# EAGLE board layer1 (EAGLE 9.6.2), part 1 of 2
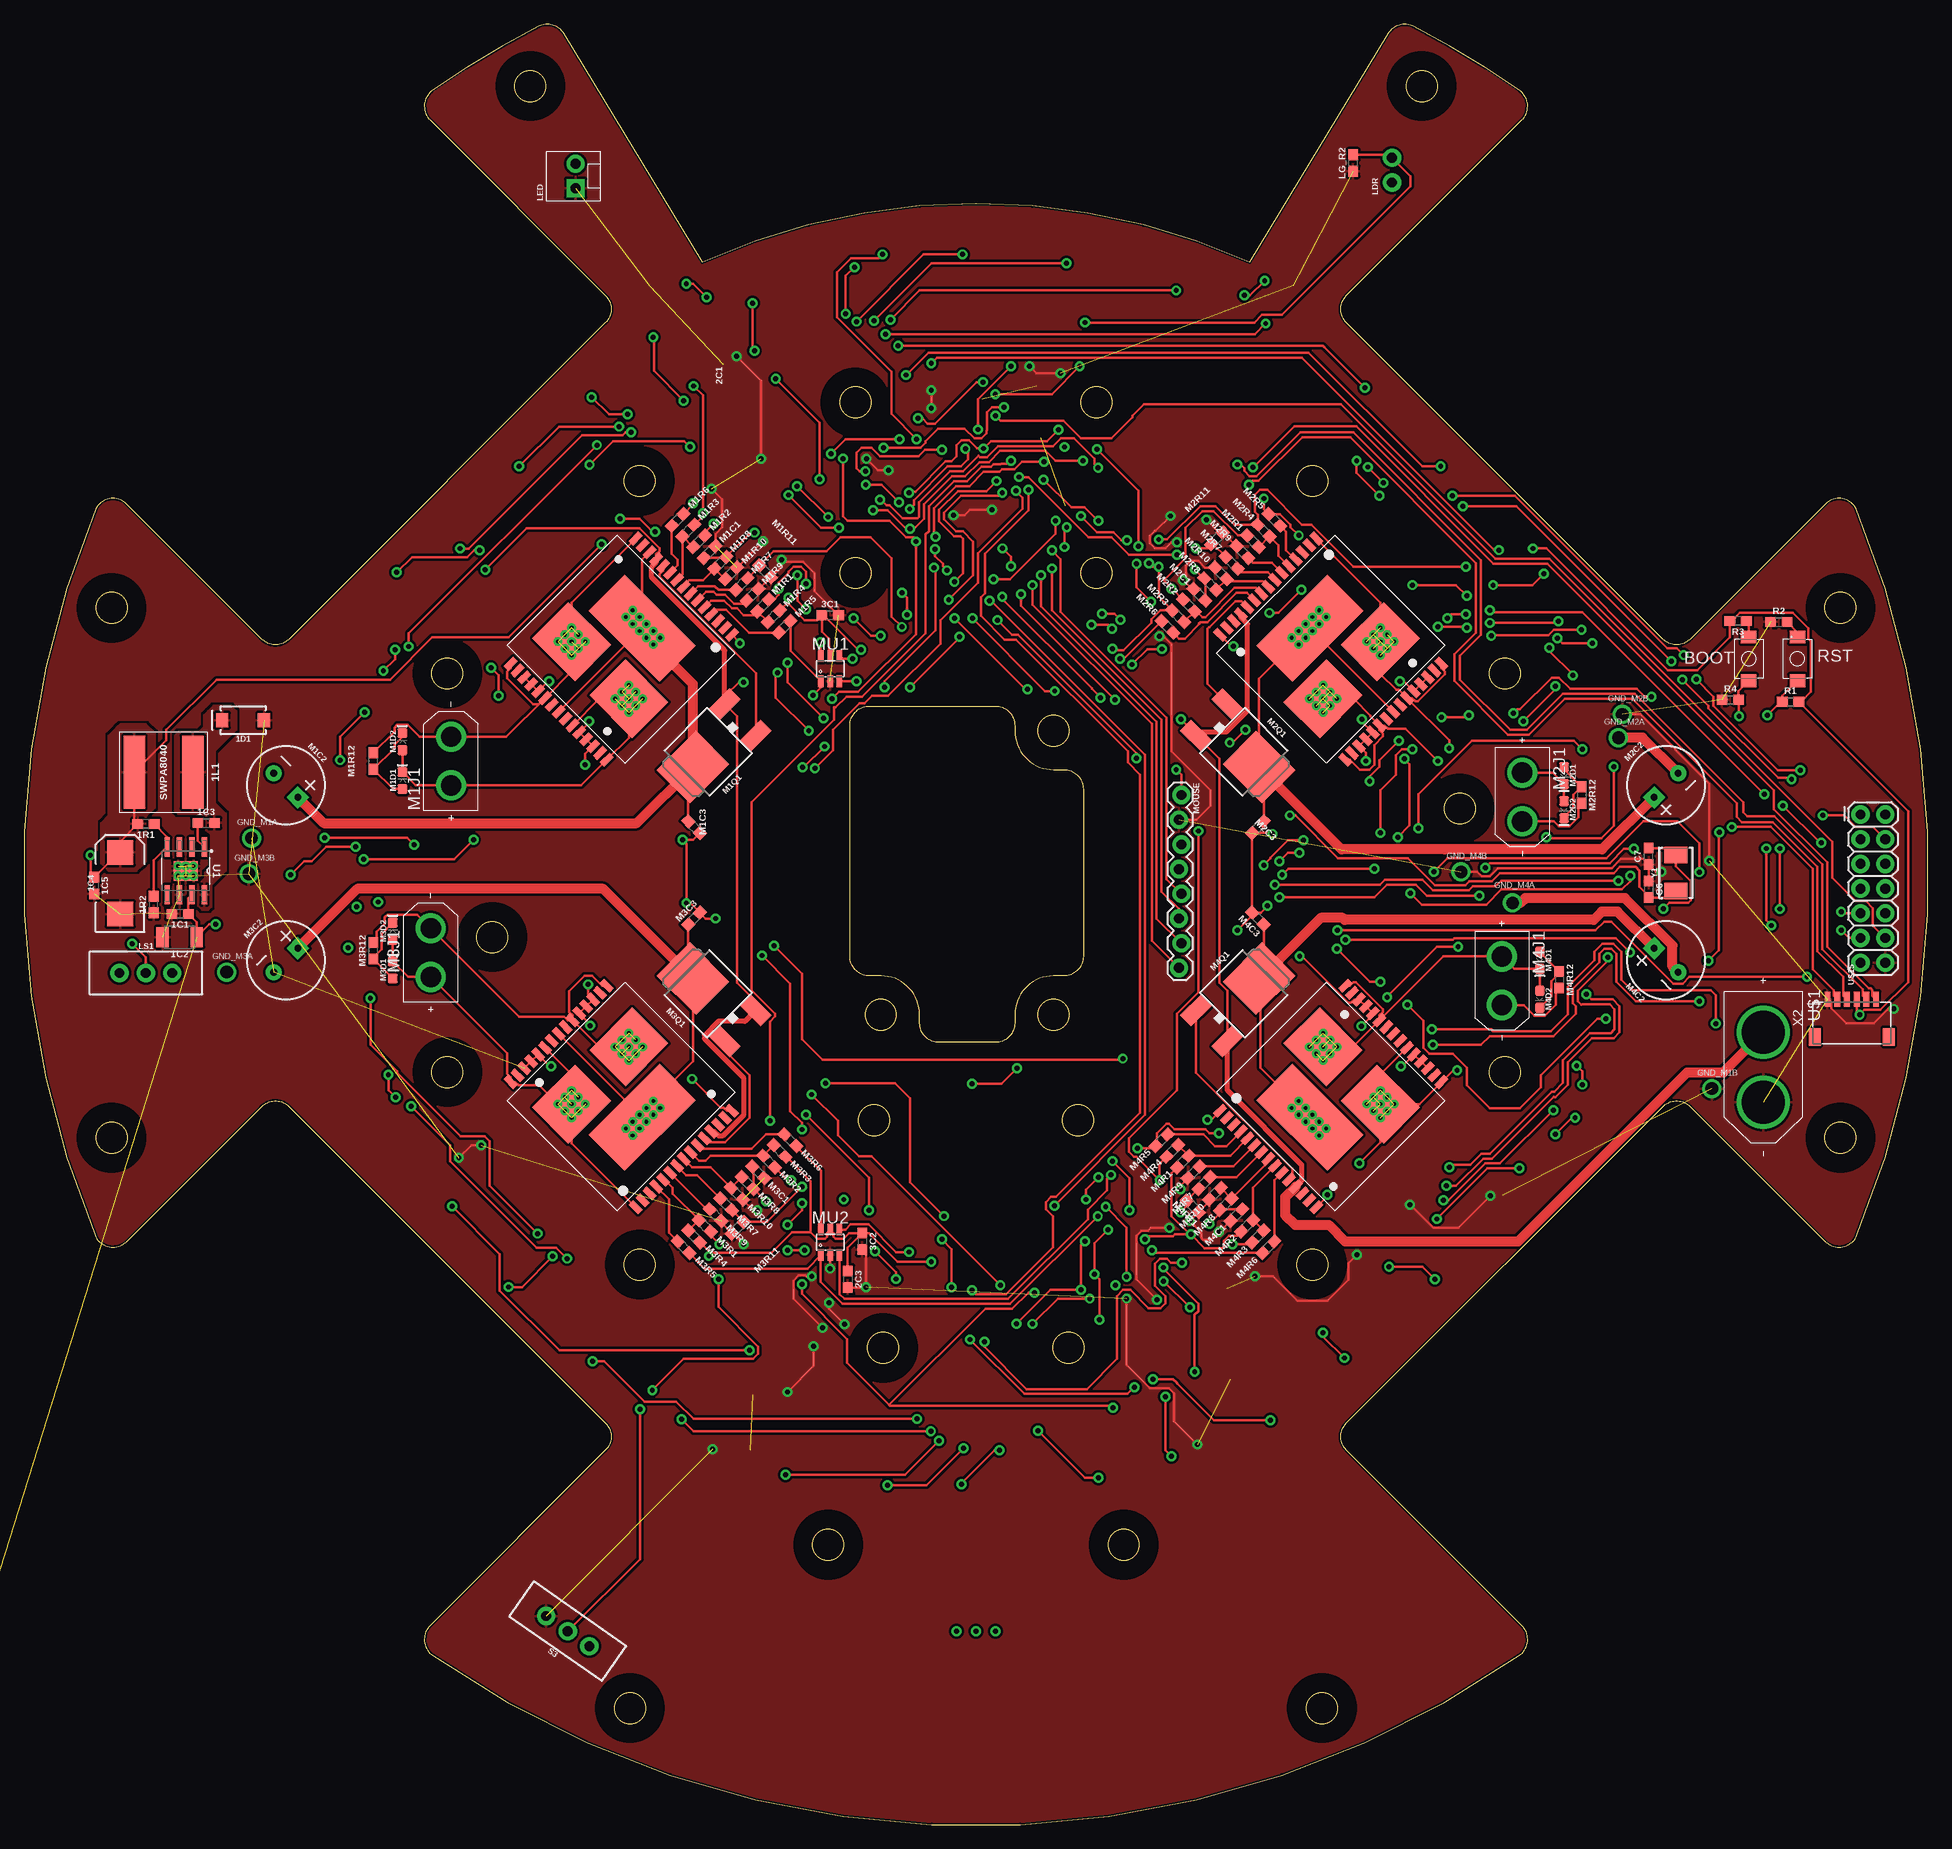
[diagram p0: board, top side]
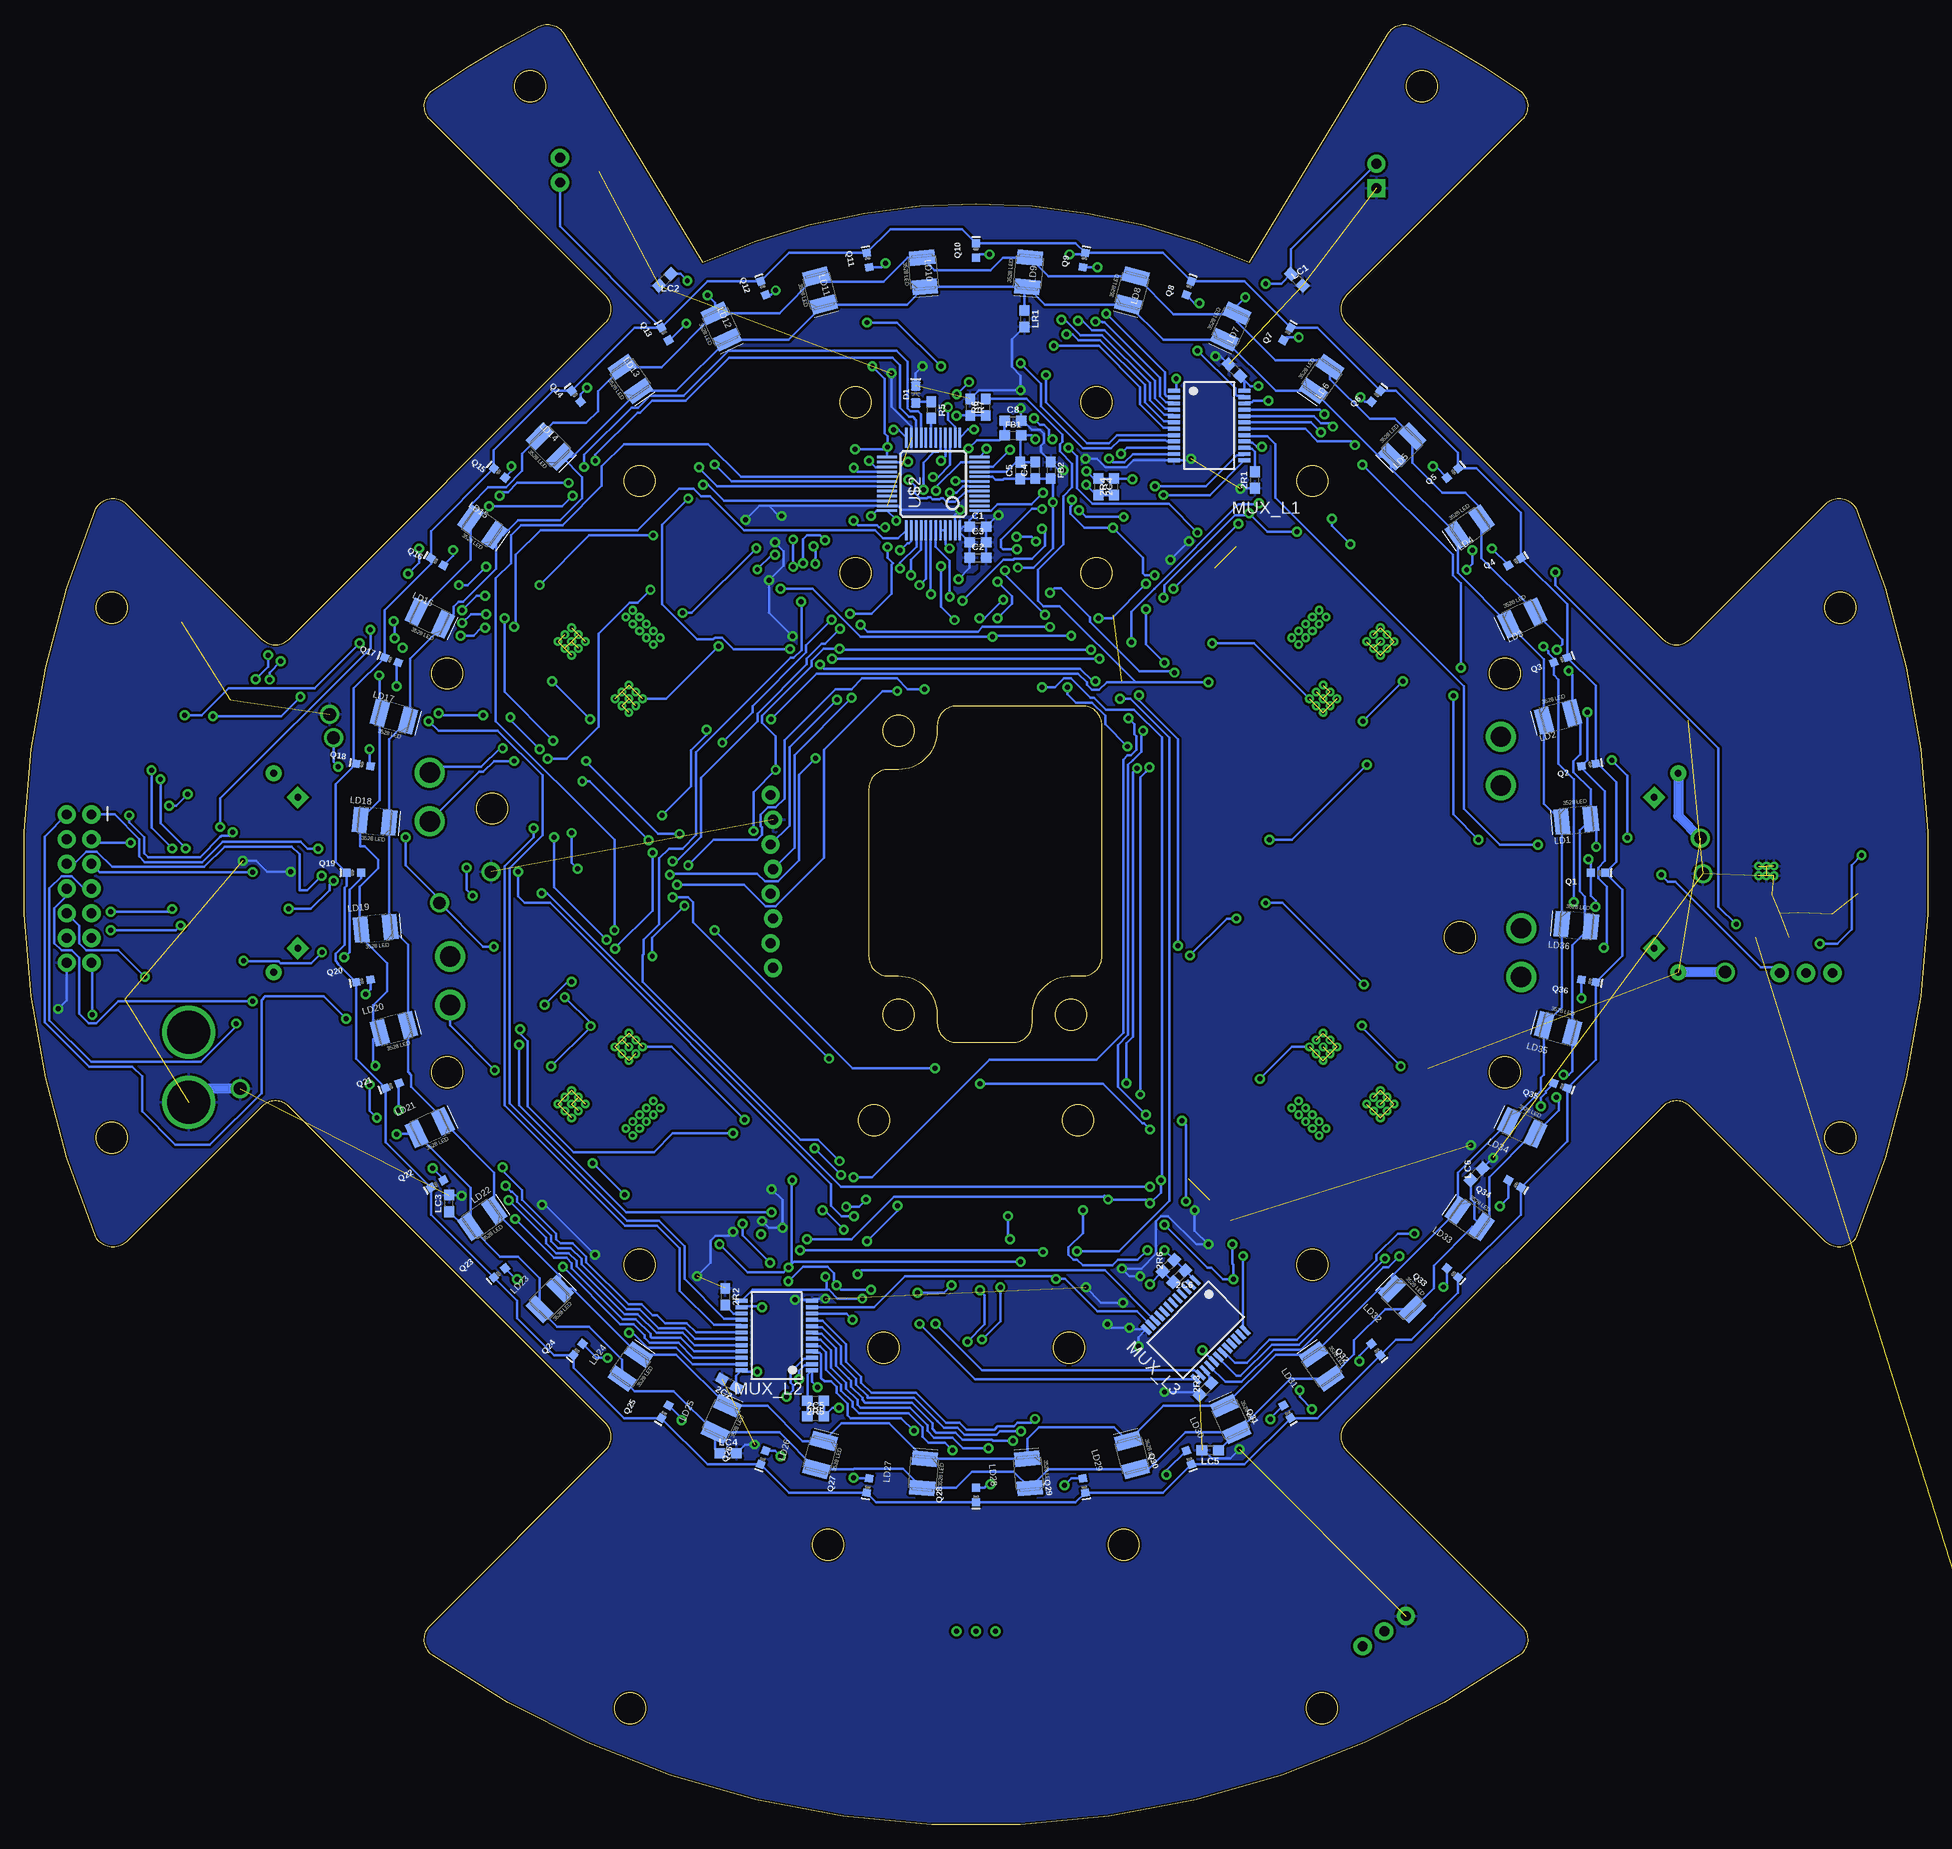
[diagram p1: board, bottom side, seen from below]

Size 195.82 x 185.17 mm. Coordinates in mm from the lower left corner, seen from the top.
Outline: 91 segments
Outline: circle at 186.83,70.65 radius 1.6
Outline: circle at 186.83,125.14 radius 1.6
Outline: circle at 105.9,112.51 radius 1.6
Outline: circle at 105.9,83.3 radius 1.6
Outline: circle at 88.12,83.3 radius 1.6
Outline: circle at 8.99,125.14 radius 1.6
Outline: circle at 8.99,70.65 radius 1.6
Outline: circle at 85.51,146.29 radius 1.6
Outline: circle at 110.31,146.29 radius 1.6
Outline: circle at 63.31,138.2 radius 1.6
Outline: circle at 132.5,138.2 radius 1.6
Outline: circle at 85.51,128.73 radius 1.6
Outline: circle at 110.31,128.73 radius 1.6
Outline: circle at 43.51,118.4 radius 1.6
Outline: circle at 105.9,112.51 radius 1.6
Outline: circle at 152.3,118.4 radius 1.6
Outline: circle at 152.3,77.39 radius 1.6
Outline: circle at 132.5,57.59 radius 1.6
Outline: circle at 87.41,72.45 radius 1.6
Outline: circle at 43.51,77.39 radius 1.6
Copper layers (1*16): Top 0.035mm / dielectric 1.5mm / Bottom 0.035mm
Design rules "SparkFun-2-layer-STANDARD": minimum track width 10mil, minimum drill 20mil, track to track 10mil, track to pad 8mil, pad to pad 8mil, via to via 10mil, smd to smd 8mil, copper to edge 8mil, drill to drill 8mil, minimum pad ring 10mil, minimum via ring 10mil, stop-mask expansion 4mil, vias tented up to drill 25mil, thermal gap 10mil
tRestrict: area 48.6,175.3 to 55.6,182.3; area 140.3,175.3 to 147.3,182.3; area 183.3,121.6 to 190.3,128.6; area 183.3,67.1 to 190.3,74.1; area 5.5,121.6 to 12.5,128.6; area 5.5,67.1 to 12.5,74.1; area 130,8.5 to 137,15.5; area 58.8,8.5 to 65.8,15.5; area 79.2,25.3 to 86.2,32.3; area 109.6,25.3 to 116.6,32.3; area 82,142.8 to 89,149.8; area 106.8,142.8 to 113.8,149.8; 19 more areas

## Footprints (pad centres in the part's own frame; a part is rotated, then mirrored left to right if it is on the bottom)
C0603 = smd 1.1 x 1: 1 -0.85,0; 2 0.85,0
C1210 = smd 1.27 x 2.06: 1 -1.755,0; 2 1.755,0
EIA7343 = smd 2.55 x 2.7: A 3.17,0; C -3.17,0
SMA-DIODE = smd 1.27 x 1.47: A -2.15,0; C 2.15,0
SWPA8040 = smd 2.2 x 7.5: P1 -3,0; P2 3,0
R0603 = smd 1.1 x 1: 1 -0.85,0; 2 0.85,0
MOMENTARY_SWITCH_4X3 = smd 1.3 x 1.6: P$1 -2.25,0; P$2 2.25,0
LED-0603 = smd 1 x 1: A -0.877,0; C 0.877,0
0603 = smd 1.1 x 1: 1 -0.85,0; 2 0.85,0
18AWG = drill 1.3: P$1 0,0
3528 = smd 1.5 x 2.6: A -1.5,0; C 1.5,0
1X02_NO_SILK = drill 1.016 pad 1.88: 1 0,0; 2 2.54,0
MOLEX-1X2 = drill 1.016 pad 1.88 square: 1 0,0 | drill 1.016 pad 1.88: 2 2.54,0
SWITCH_SPDT_PTH_11.6X4.0MM_LOCK = drill 1.016 pad 1.88: 1 0,2.718; 2 0,0; 3 0,-2.718
3.5MM_CAP = drill 0.7 pad 1.651 square: 1 1.75,0 | drill 0.7 pad 1.651: 2 -1.75,0
XT30PB-F = drill 2.1: + -2.5,0; - 2.5,0
DPAK = smd 1.6 x 3: 1 -2.28,-5.31; 3 2.28,-5.31 | smd 4.826 x 5.715: 4 0,1.588
POWERSO-30 = smd 0.65 x 1.4: P1 -7,-9.1; P2 -6,-9.1; P3 -5,-9.1; P4 -4,-9.1; P5 -3,-9.1; P6 -2,-9.1; P7 -1,-9.1; P8 0,-9.1; P9 1,-9.1; P10 2,-9.1; P11 3,-9.1; P12 4,-9.1; P13 5,-9.1; P14 6,-9.1; P15 7,-9.1; P16 7,9.1; P17 6,9.1; P18 5,9.1; P19 4,9.1; P20 3,9.1; P21 2,9.1; P22 1,9.1; P23 0,9.1; P24 -1,9.1; P25 -2,9.1; P26 -3,9.1; P27 -4,9.1; P28 -5,9.1; P29 -6,9.1; P30 -7,9.1 | drill 0.381: P$1 -4.165,3.05; P$2 -3.165,3.05; P$3 -5.165,3.05; P$4 -5.165,2.05; P$5 -4.165,2.05; P$6 -3.165,2.05; P$7 -5.165,4.05; P$8 -4.165,4.05; P$9 -3.165,4.05; P$10 4.165,3.05; P$11 5.165,3.05; P$12 3.165,3.05; P$13 3.165,2.05; P$14 4.165,2.05; P$15 5.165,2.05; P$16 3.165,4.05; P$17 4.165,4.05; P$18 5.165,4.05; P$19 0,-2.669; P$20 -1,-2.669; P$21 1,-2.669; P$22 -2,-2.669; P$23 2,-2.669; P$24 0,-3.669; P$25 1,-3.669; P$26 2,-3.669; P$27 -1,-3.669; P$28 -2,-3.669 | smd 10.3 x 5.25: SLUG1 0,-3.05 | smd 6.23 x 5.25: SLUG2 -4.165,3.05; SLUG3 4.165,3.05
1X08_LOCK = drill 1.016 pad 1.88: 1 0,0.127; 2 2.54,-0.127; 3 5.08,0.127; 4 7.62,-0.127; 5 10.16,0.127; 6 12.7,-0.127; 7 15.24,0.127; 8 17.78,-0.127
SOT23-6 = smd 0.55 x 1.2: 1 -0.95,-1.3; 2 0,-1.3; 3 0.95,-1.3; 4 0.95,1.3; 5 0,1.3; 6 -0.95,1.3
SSOP24 = smd 0.4 x 1.25: 1 -3.575,-3.625; 2 -2.925,-3.625; 3 -2.275,-3.625; 4 -1.625,-3.625; 5 -0.975,-3.625; 6 -0.325,-3.625; 7 0.325,-3.625; 8 0.975,-3.625; 9 1.625,-3.625; 10 2.275,-3.625; 11 2.925,-3.625; 12 3.575,-3.625; 13 3.575,3.625; 14 2.925,3.625; 15 2.275,3.625; 16 1.625,3.625; 17 0.975,3.625; 18 0.325,3.625; 19 -0.325,3.625; 20 -0.975,3.625; 21 -1.625,3.625; 22 -2.275,3.625; 23 -2.925,3.625; 24 -3.575,3.625
ALS-PT19 = smd 0.8 x 0.8: C -0.75,0; E 0.75,0
POWERPAD-SOIC-8 = smd 1.981 x 0.559: 1 -2.464,1.905; 2 -2.464,0.635; 3 -2.464,-0.635; 4 -2.464,-1.905; 5 2.464,-1.905; 6 2.464,-0.635; 7 2.464,0.635; 8 2.464,1.905 | smd 2.007 x 2.489: 9 0,0 | drill 0.381: P$1 -0.5,0.8; P$2 0.5,0.8; P$3 -0.5,0; P$4 0.5,0; P$5 -0.5,-0.8; P$6 0.5,-0.8
XT60PB-M = drill 4.4: + -3.6,0; - 3.6,0
LQFP48 = smd 0.254 x 2.032: 1 -2.75,-4.758; 2 -2.25,-4.758; 3 -1.75,-4.758; 4 -1.25,-4.758; 5 -0.75,-4.758; 6 -0.25,-4.758; 7 0.25,-4.758; 8 0.75,-4.758; 9 1.25,-4.758; 10 1.75,-4.758; 11 2.25,-4.758; 12 2.75,-4.758; 25 2.75,4.758; 26 2.25,4.758; 27 1.75,4.758; 28 1.25,4.758; 29 0.75,4.758; 30 0.25,4.758; 31 -0.25,4.758; 32 -0.75,4.758; 33 -1.25,4.758; 34 -1.75,4.758; 35 -2.25,4.758; 36 -2.75,4.758 | smd 2.032 x 0.254: 13 4.758,-2.75; 14 4.758,-2.25; 15 4.758,-1.75; 16 4.758,-1.25; 17 4.758,-0.75; 18 4.758,-0.25; 19 4.758,0.25; 20 4.758,0.75; 21 4.758,1.25; 22 4.758,1.75; 23 4.758,2.25; 24 4.758,2.75; 37 -4.758,2.75; 38 -4.758,2.25; 39 -4.758,1.75; 40 -4.758,1.25; 41 -4.758,0.75; 42 -4.758,0.25; 43 -4.758,-0.25; 44 -4.758,-0.75; 45 -4.758,-1.25; 46 -4.758,-1.75; 47 -4.758,-2.25; 48 -4.758,-2.75
2X7 = drill 1.016 pad 1.88: 1 0,0; 2 0,2.54; 3 2.54,0; 4 2.54,2.54; 5 5.08,0; 6 5.08,2.54; 7 7.62,0; 8 7.62,2.54; 9 10.16,0; 10 10.16,2.54; 11 12.7,0; 12 12.7,2.54; 13 15.24,0; 14 15.24,2.54
SM06B-SRSS-TB = smd 0.6 x 1.55: 1 2.5,0; 2 1.5,0; 3 0.5,0; 4 -0.5,0; 5 -1.5,0; 6 -2.5,0 | smd 1.2 x 1.8: M1 3.8,3.875; M2 -3.8,3.875
CRYSTAL-SMD-5X3.2-2PAD = smd 1.7 x 2.4: P$1 1.85,0; P$2 -1.85,0

## Placement (x,y rotation side)
1C1  4.7uF  [C0603]  16.03,93.67 180 top
1C2  22uF  [C1210]  15.98,91.28 180 top
1C3  10nF  [C0603]  18.71,103.03 0 top
1C4  220uF  [EIA7343]  9.86,96.82 90 top
1C5  0.1uF  [C0603]  7.18,96.58 270 top
1D1  SS54  [SMA-DIODE]  22.51,113.59 180 top
1L1  10uH  [SWPA8040]  14.33,108.24 180 top
1R1  10k  [R0603]  12.51,102.92 180 top
1R2  5.9k  [R0603]  13.32,94.64 90 top
2C1  0.1uF  [C0603]  71.31,149.59 135 bottom
2C2  0.1uF  [C0603]  123.31,45.39 150 bottom
2C3  0.1uF  [C0603]  84.71,56.09 270 top
2C4  1uF  [C0603]  85.31,137.59 270 bottom
2C5  1uF  [C0603]  114.41,41.99 0 bottom
2C6  1uF  [C0603]  77.01,56.39 225 bottom
2R1  1k  [R0603]  69.21,138.29 90 bottom
2R2  1k  [R0603]  123.71,54.29 270 bottom
2R3  1k  [R0603]  74.31,44.79 45 bottom
2R4  3k  [R0603]  83.71,137.59 90 bottom
2R5  3k  [R0603]  114.41,43.59 180 bottom
2R6  3k  [R0603]  78.11,57.49 45 bottom
3C1  0.1uF  [C0603]  82.91,124.39 0 top
3C2  0.1uF  [C0603]  86.21,59.99 270 top
BOOT  MOMENTARY_SWITCH_4X3  [MOMENTARY_SWITCH_4X3]  177.41,119.89 270 top
C1  1uF  [C0603]  97.71,133.49 0 bottom
C2  1uF  [C0603]  97.71,130.29 0 bottom
C3  1uF  [C0603]  97.71,131.89 0 bottom
C4  10nF  [C0603]  91.81,139.29 90 bottom
C5  1uF  [C0603]  93.35,139.27 90 bottom
C6  22pF  [C0603]  167.11,96.19 270 top
C7  22pF  [C0603]  167.11,99.59 90 top
C8  1uF  [C0603]  94.11,144.39 0 bottom
D1  BLUE  [LED-0603]  104.11,147.09 90 bottom
FB1  30Ω/1.8A  [0603]  94.11,142.89 0 bottom
FB2  30Ω/1.8A  [0603]  90.21,139.29 270 bottom
GND_M1A  18AWG  [18AWG]  23.38,101.46 0 top
GND_M1B  18AWG  [18AWG]  173.61,75.69 0 top
GND_M2A  18AWG  [18AWG]  164.01,111.79 0 top
GND_M2B  18AWG  [18AWG]  164.41,114.19 0 top
GND_M3A  18AWG  [18AWG]  20.83,87.68 0 top
GND_M3B  18AWG  [18AWG]  23.11,97.79 0 top
GND_M4A  18AWG  [18AWG]  153.11,94.79 0 top
GND_M4B  18AWG  [18AWG]  147.81,97.99 0 top
LC1  1uF  [C0603]  64.91,158.89 315 bottom
LC2  1uF  [C0603]  129.91,158.89 225 bottom
LC3  1uF  [C0603]  152.11,63.89 90 bottom
LC4  1uF  [C0603]  123.41,38.19 0 bottom
LC5  1uF  [C0603]  73.81,38.49 180 bottom
LC6  1uF  [C0603]  46.41,66.89 45 bottom
LD1  3528LED  [3528]  36.14,103.3 185 bottom
LD2  3528LED  [3528]  38.02,113.94 195 bottom
LD3  3528LED  [3528]  41.72,124.1 205 bottom
LD4  3528LED  [3528]  47.12,133.46 215 bottom
LD5  3528LED  [3528]  54.07,141.73 225 bottom
LD6  3528LED  [3528]  62.35,148.68 235 bottom
LD7  3528LED  [3528]  71.71,154.09 245 bottom
LD8  3528LED  [3528]  81.86,157.78 255 bottom
LD9  3528LED  [3528]  92.5,159.66 265 bottom
LD10  3528LED  [3528]  103.31,159.66 275 bottom
LD11  3528LED  [3528]  113.96,157.78 285 bottom
LD12  3528LED  [3528]  124.11,154.09 295 bottom
LD13  3528LED  [3528]  133.47,148.68 305 bottom
LD14  3528LED  [3528]  141.75,141.73 315 bottom
LD15  3528LED  [3528]  148.7,133.46 325 bottom
LD16  3528LED  [3528]  154.1,124.1 335 bottom
LD17  3528LED  [3528]  157.8,113.94 345 bottom
LD18  3528LED  [3528]  159.77,103.2 355 bottom
LD19  3528LED  [3528]  159.67,92.19 5 bottom
LD20  3528LED  [3528]  157.8,81.85 15 bottom
LD21  3528LED  [3528]  154.1,71.69 25 bottom
LD22  3528LED  [3528]  148.7,62.33 35 bottom
LD23  3528LED  [3528]  141.75,54.05 45 bottom
LD24  3528LED  [3528]  133.47,47.11 55 bottom
LD25  3528LED  [3528]  124.11,41.7 65 bottom
LD26  3528LED  [3528]  113.96,38.01 75 bottom
LD27  3528LED  [3528]  103.31,36.13 85 bottom
LD28  3528LED  [3528]  92.5,36.13 95 bottom
LD29  3528LED  [3528]  81.86,38.01 105 bottom
LD30  3528LED  [3528]  71.71,41.7 115 bottom
LD31  3528LED  [3528]  62.35,47.11 125 bottom
LD32  3528LED  [3528]  54.07,54.05 135 bottom
LD33  3528LED  [3528]  47.12,62.33 145 bottom
LD34  3528LED  [3528]  41.72,71.69 155 bottom
LD35  3528LED  [3528]  38.02,81.85 165 bottom
LD36  3528LED  [3528]  36.14,92.49 175 bottom
LDR  [1X02_NO_SILK]  140.71,168.89 90 top
LED  [MOLEX-1X2]  56.71,168.29 90 top
LG_R2  2k  [R0603]  136.71,170.89 90 top
LR1  47  [R0603]  92.91,154.89 270 bottom
LS1  [SWITCH_SPDT_PTH_11.6X4.0MM_LOCK]  12.51,87.59 270 top
M1C1  33nF  [C0603]  70.51,130.89 45 top
M1C2  680uF  [3.5MM_CAP]  26.91,106.89 315 top
M1C3  1.0uF  [C0603]  68.91,102.59 315 top
M1D1  RED  [LED-0603]  38.91,107.39 90 top
M1D2  BLUE  [LED-0603]  38.91,111.39 90 top
M1J1  XT30PB-F  [XT30PB-F]  43.91,109.39 90 top
M1Q1  AOD482  [DPAK]  69.91,109.89 135 top
M1R1  1k  [R0603]  76.01,125.39 225 top
M1R2  1k  [R0603]  69.41,131.99 225 top
M1R3  3.3k  [R0603]  68.31,133.09 45 top
M1R4  3.3k  [R0603]  77.11,124.29 45 top
M1R5  1k  [R0603]  78.21,123.19 225 top
M1R6  1k  [R0603]  67.21,134.19 225 top
M1R7  1k  [R0603]  73.81,127.59 225 top
M1R8  10k  [R0603]  71.61,129.79 225 top
M1R9  10k  [R0603]  74.91,126.49 225 top
M1R10  1k  [R0603]  72.71,128.69 225 top
M1R11  10k  [R0603]  76.21,128.89 135 top
M1R12  4.7k  [R0603]  35.91,109.39 90 top
M2C1  33nF  [C0603]  120.91,126.49 135 top
M2C2  680uF  [3.5MM_CAP]  168.91,106.89 225 top
M2C3  1.0uF  [C0603]  126.91,102.59 225 top
M2D1  RED  [LED-0603]  158.41,107.89 270 top
M2D2  BLUE  [LED-0603]  158.41,104.39 270 top
M2J1  XT30PB-F  [XT30PB-F]  154.11,105.69 270 top
M2Q1  AOD482  [DPAK]  125.91,109.89 225 top
M2R1  1k  [R0603]  126.41,131.99 315 top
M2R2  1k  [R0603]  119.81,125.39 315 top
M2R3  3.3k  [R0603]  118.71,124.29 135 top
M2R4  3.3k  [R0603]  127.51,133.09 135 top
M2R5  1k  [R0603]  128.61,134.19 315 top
M2R6  1k  [R0603]  117.61,123.19 315 top
M2R7  1k  [R0603]  124.21,129.79 315 top
M2R8  10k  [R0603]  122.01,127.59 315 top
M2R9  10k  [R0603]  125.31,130.89 315 top
M2R10  1k  [R0603]  123.11,128.69 315 top
M2R11  10k  [R0603]  122.71,132.29 225 top
M2R12  4.7k  [R0603]  160.21,105.89 270 top
M3C1  33nF  [C0603]  75.51,67.09 315 top
M3C2  680uF  [3.5MM_CAP]  26.91,88.89 45 top
M3C3  1.0uF  [C0603]  68.91,93.19 45 top
M3D1  RED  [LED-0603]  37.91,87.89 90 top
M3D2  BLUE  [LED-0603]  37.91,91.89 90 top
M3J1  XT30PB-F  [XT30PB-F]  41.81,89.69 90 top
M3Q1  AOD482  [DPAK]  69.91,85.89 45 top
M3R1  1k  [R0603]  70.01,61.59 135 top
M3R2  1k  [R0603]  76.61,68.19 135 top
M3R3  3.3k  [R0603]  77.71,69.29 315 top
M3R4  3.3k  [R0603]  68.91,60.49 315 top
M3R5  1k  [R0603]  67.81,59.39 135 top
M3R6  1k  [R0603]  78.81,70.39 135 top
M3R7  1k  [R0603]  72.21,63.79 135 top
M3R8  10k  [R0603]  74.41,65.99 135 top
M3R9  10k  [R0603]  71.11,62.69 135 top
M3R10  1k  [R0603]  73.31,64.89 135 top
M3R11  10k  [R0603]  73.41,61.39 45 top
M3R12  4.7k  [R0603]  35.91,89.89 90 top
M4C1  33nF  [C0603]  124.71,62.69 225 top
M4C2  680uF  [3.5MM_CAP]  168.91,88.89 135 top
M4C3  1.0uF  [C0603]  126.91,93.19 135 top
M4D1  RED  [LED-0603]  155.91,88.89 270 top
M4D2  BLUE  [LED-0603]  155.91,84.89 270 top
M4J1  XT30PB-F  [XT30PB-F]  152.01,86.79 270 top
M4Q1  AOD482  [DPAK]  125.91,85.89 315 top
M4R1  1k  [R0603]  119.21,68.19 45 top
M4R2  1k  [R0603]  125.81,61.59 45 top
M4R3  3.3k  [R0603]  126.91,60.49 225 top
M4R4  3.3k  [R0603]  118.11,69.29 225 top
M4R5  1k  [R0603]  117.01,70.39 45 top
M4R6  1k  [R0603]  128.01,59.39 45 top
M4R7  1k  [R0603]  121.41,65.99 45 top
M4R8  10k  [R0603]  123.61,63.79 45 top
M4R9  10k  [R0603]  120.31,67.09 45 top
M4R10  1k  [R0603]  122.51,64.89 45 top
M4R11  10k  [R0603]  120.21,63.59 135 top
M4R12  4.7k  [R0603]  157.91,86.89 270 top
M_BL  VNH5019  [POWERSO-30]  61.41,74.89 45 top
M_BR  VNH5019  [POWERSO-30]  134.41,74.89 315 top
M_FL  VNH5019  [POWERSO-30]  61.41,120.89 135 top
M_FR  VNH5019  [POWERSO-30]  134.41,120.89 225 top
MOUSE  [1X08_LOCK]  118.91,105.89 270 top
MU1  [SOT23-6]  82.91,118.89 0 top
MU2  [SOT23-6]  82.91,59.89 0 top
MUX_L1  [SSOP24]  73.91,143.89 270 bottom
MUX_L2  [SSOP24]  118.41,50.29 90 bottom
MUX_L3  [SSOP24]  75.31,50.89 225 bottom
Q1  [ALS-PT19]  33.91,97.89 180 bottom
Q2  [ALS-PT19]  34.88,109.01 190 bottom
Q3  [ALS-PT19]  37.77,119.78 200 bottom
Q4  [ALS-PT19]  42.48,129.89 210 bottom
Q5  [ALS-PT19]  48.88,139.03 220 bottom
Q6  [ALS-PT19]  56.77,146.92 230 bottom
Q7  [ALS-PT19]  65.91,153.32 240 bottom
Q8  [ALS-PT19]  76.02,158.03 250 bottom
Q9  [ALS-PT19]  86.79,160.92 260 bottom
Q10  [ALS-PT19]  97.91,161.89 270 bottom
Q11  [ALS-PT19]  109.02,160.92 280 bottom
Q12  [ALS-PT19]  119.8,158.03 290 bottom
Q13  [ALS-PT19]  129.91,153.32 300 bottom
Q14  [ALS-PT19]  139.05,146.92 310 bottom
Q15  [ALS-PT19]  146.94,139.03 320 bottom
Q16  [ALS-PT19]  153.33,129.89 330 bottom
Q17  [ALS-PT19]  158.05,119.78 340 bottom
Q18  [ALS-PT19]  160.94,109.01 350 bottom
Q19  [ALS-PT19]  161.91,97.89 0 bottom
Q20  [ALS-PT19]  160.94,86.78 10 bottom
Q21  [ALS-PT19]  157.95,76 20 bottom
Q22  [ALS-PT19]  153.33,65.89 30 bottom
Q23  [ALS-PT19]  146.94,56.76 40 bottom
Q24  [ALS-PT19]  138.85,48.87 50 bottom
Q25  [ALS-PT19]  129.91,42.47 60 bottom
Q26  [ALS-PT19]  119.8,37.75 70 bottom
Q27  [ALS-PT19]  109.02,34.87 80 bottom
Q28  [ALS-PT19]  97.91,33.89 90 bottom
Q29  [ALS-PT19]  86.79,34.87 100 bottom
Q30  [ALS-PT19]  76.02,37.75 110 bottom
Q31  [ALS-PT19]  65.91,42.47 120 bottom
Q32  [ALS-PT19]  56.77,48.87 130 bottom
Q33  [ALS-PT19]  48.88,56.76 140 bottom
Q34  [ALS-PT19]  42.48,65.89 150 bottom
Q35  [ALS-PT19]  37.77,76 160 bottom
Q36  [ALS-PT19]  34.88,86.78 170 bottom
R1  10k  [R0603]  181.71,115.49 0 top
R2  1k  [R0603]  180.51,123.69 0 top
R3  1k  [R0603]  176.31,123.79 180 top
R4  10k  [R0603]  175.51,115.69 0 top
R5  470  [R0603]  102.51,145.49 270 bottom
R6  2M  [R0603]  96.91,145.79 90 bottom
R7  500k  [R0603]  98.51,145.79 270 bottom
RST  MOMENTARY_SWITCH_4X3  [MOMENTARY_SWITCH_4X3]  182.41,119.89 270 top
S3  [SWITCH_SPDT_PTH_11.6X4.0MM_LOCK]  55.91,19.89 55 top
U1  [POWERPAD-SOIC-8]  16.61,98.09 270 top
U$1  XT60XT60PB-M  [XT60PB-M]  178.91,77.89 270 top
U$2  STM32F103CBT6  [LQFP48]  102.31,137.89 90 bottom
U$15  CONN_07X2  [2X7]  188.91,103.89 270 top
V_BATT_M1  18AWG  [18AWG]  -15.29,-14.61 0 top  (outside the outline)
V_BATT_M2  18AWG  [18AWG]  -15.29,-17.91 0 top  (outside the outline)
V_BATT_M3  18AWG  [18AWG]  -15.29,-21.21 0 top  (outside the outline)
V_BATT_M4  18AWG  [18AWG]  -15.29,-24.51 0 top  (outside the outline)
X2  SM06B-SRSS-TB  [SM06B-SRSS-TB]  188.01,84.89 180 top
Y1  8MHz  [CRYSTAL-SMD-5X3.2-2PAD]  169.91,97.89 90 top

## Library data of the parts
1C1-1C3 1C5 1D1 1L1 1R1 1R2 2C1-2C6 2R1-2R6 3C1 3C2 C1-C8 GND_M1A GND_M1B GND_M2A GND_M2B GND_M3A GND_M3B GND_M4A GND_M4B LC1-LC6 LD1-LD36 LG_R2 LR1 M1C1 M1C3 M1J1 M1R1-M1R12 M2C1 M2C3 M2J1 M2R1-M2R12 M3C1 M3C3 M3J1 M3R1-M3R12 M4C1 M4C3 M4J1 M4R1-M4R12 M_BL M_BR M_FL M_FR MUX_L1-MUX_L3 R1-R7 U1 U$1 U$2 V_BATT_M1-V_BATT_M4 = JH
1C4 = SparkFun-Capacitors; PROD_ID: CAP-07890
BOOT M1C2 M2C2 M3C2 M4C2 MU1 MU2 RST U$15 = MY-LIBRARY
D1 = SparkFun-LED
FB1 FB2 = SparkFun-Coils; PROD_ID: NDUC-13805
LDR MOUSE = SparkFun-Connectors
LED = SparkFun-Connectors; SF_ID: PRT-09918
LS1 S3 = SparkFun-Switches; PROD_ID: SWCH-08261; SF_SKU: COM-00102
M1D1 M2D1 M3D1 M4D1 = SparkFun-LED; PROD_ID: DIO-00819
M1D2 M2D2 M3D2 M4D2 = SparkFun-LED; PROD_ID: DIO-08575
M1Q1 M2Q1 M3Q1 M4Q1 = SparkFun-DiscreteSemi; PROD_ID: TRANS-09984
Q1-Q36 = SparkFun-Sensors; PROD_ID: IC-11836; SF_ID: SEN-12566
X2 = con-JST SH
Y1 = SparkFun-Clocks

## Nets
3.3V: 1C4.A 1C5.1 1L1.P2 1R1.2 2C1.1 2C2.1 2C3.1 3C1.1 3C2.1 C1.1 C2.1 C3.1 C8.1 FB1.1 LS1.2 M1R3.2 M1R4.2 M2R3.2 M2R4.2 M3R3.2 M3R4.2 M4R3.2 M4R4.2 MOUSE.1 MU1.5 MU2.5 MUX_L1.24 MUX_L2.24 MUX_L3.24 R1.2 R3.2 U$2.1 U$2.24 U$2.36 U$2.48 U$15.13 X2.4
AGND: 2C4.2 2C5.2 2C6.2 2R4.1 2R5.1 2R6.1 C4.1 C5.1 FB2.2 U$2.8
BATT_LVL: R6.1 R7.2 U$15.12
BL_CS: M3C1.1 M3R8.1 U$2.16
BL_DIR: M3R5.1 MU2.1 U$15.5
BL_OUTA: M3D1.C M3D2.A M3J1.+ M_BL.P1 M_BL.P25 M_BL.P30 M_BL.P$1 M_BL.P$2 M_BL.P$3 M_BL.P$4 M_BL.P$5 M_BL.P$6 M_BL.P$7 M_BL.P$8 M_BL.P$9 M_BL.SLUG2
BL_OUTB: M3J1.- M3R12.2 M_BL.P15 M_BL.P16 M_BL.P21 M_BL.P$10 M_BL.P$11 M_BL.P$12 M_BL.P$13 M_BL.P$14 M_BL.P$15 M_BL.P$16 M_BL.P$17 M_BL.P$18 M_BL.SLUG3
BL_PWM: M3R7.1 M3R11.2 U$15.6
BOOT0: BOOT.P$2 R4.2 U$2.44 U$2.45
BR_CS: M4C1.1 M4R8.1 U$2.17
BR_DIR: M4R5.1 MU2.3 U$15.7
BR_OUTA: M4D1.C M4D2.A M4J1.+ M_BR.P1 M_BR.P25 M_BR.P30 M_BR.P$1 M_BR.P$2 M_BR.P$3 M_BR.P$4 M_BR.P$5 M_BR.P$6 M_BR.P$7 M_BR.P$8 M_BR.P$9 M_BR.SLUG2
BR_OUTB: M4J1.- M4R12.2 M_BR.P15 M_BR.P16 M_BR.P21 M_BR.P$10 M_BR.P$11 M_BR.P$12 M_BR.P$13 M_BR.P$14 M_BR.P$15 M_BR.P$16 M_BR.P$17 M_BR.P$18 M_BR.SLUG3
BR_PWM: M4R7.1 M4R11.2 U$15.8
FL_CS: M1C1.1 M1R8.1 U$2.14
FL_DIR: M1R5.1 MU1.1 U$15.1
FL_OUTA: M1D1.C M1D2.A M1J1.+ M_FL.P1 M_FL.P25 M_FL.P30 M_FL.P$1 M_FL.P$2 M_FL.P$3 M_FL.P$4 M_FL.P$5 M_FL.P$6 M_FL.P$7 M_FL.P$8 M_FL.P$9 M_FL.SLUG2
FL_OUTB: M1J1.- M1R12.2 M_FL.P15 M_FL.P16 M_FL.P21 M_FL.P$10 M_FL.P$11 M_FL.P$12 M_FL.P$13 M_FL.P$14 M_FL.P$15 M_FL.P$16 M_FL.P$17 M_FL.P$18 M_FL.SLUG3
FL_PWM: M1R7.1 M1R11.2 U$15.2
FR_CS: M2C1.1 M2R8.1 U$2.15
FR_DIR: M2R5.1 MU1.3 U$15.3
FR_OUTA: M2D1.C M2D2.A M2J1.+ M_FR.P1 M_FR.P25 M_FR.P30 M_FR.P$1 M_FR.P$2 M_FR.P$3 M_FR.P$4 M_FR.P$5 M_FR.P$6 M_FR.P$7 M_FR.P$8 M_FR.P$9 M_FR.SLUG2
FR_OUTB: M2J1.- M2R12.2 M_FR.P15 M_FR.P16 M_FR.P21 M_FR.P$10 M_FR.P$11 M_FR.P$12 M_FR.P$13 M_FR.P$14 M_FR.P$15 M_FR.P$16 M_FR.P$17 M_FR.P$18 M_FR.SLUG3
FR_PWM: M2R7.1 M2R11.2 U$15.4
GND: 1C1.2 1C2.2 1C4.C 1C5.2 1D1.A 1R2.1 2C1.2 2C2.2 2C3.2 2R1.1 2R2.1 2R3.1 3C1.2 3C2.2 C1.2 C2.2 C3.2 C6.1 C7.1 C8.2 D1.C FB2.1 GND_M1B.P$1 GND_M2B.P$1 GND_M3B.P$1 GND_M4B.P$1 LC1.2 LC2.2 LC3.2 LC4.2 LC5.2 LC6.2 LED.1 LG_R2.1 LR1.2 M1C1.2 M1R9.1 M1R10.1 M1R11.1 M2C1.2 M2R9.1 M2R10.1 M2R11.1 M3C1.2 M3R9.1 M3R10.1 M3R11.1 M4C1.2 M4R9.1 M4R10.1 M4R11.1 MOUSE.2 MU1.2 MU2.2 MUX_L1.12 MUX_L2.12 MUX_L3.12 R2.1 R4.1 R7.1 S3.1 U1.6 U1.9 U1.P$1 U1.P$2 U1.P$3 U1.P$4 U1.P$5 U1.P$6 U$1.- U$2.23 U$2.35 U$2.47 U$15.14 X2.1
GND_M: GND_M1A.P$1 GND_M2A.P$1 GND_M3A.P$1 GND_M4A.P$1 M1C2.2 M1C3.2 M2C2.2 M2C3.2 M3C2.2 M3C3.2 M4C2.2 M4C3.2 M_BL.P18 M_BL.P19 M_BL.P20 M_BL.P26 M_BL.P27 M_BL.P28 M_BR.P18 M_BR.P19 M_BR.P20 M_BR.P26 M_BR.P27 M_BR.P28 M_FL.P18 M_FL.P19 M_FL.P20 M_FL.P26 M_FL.P27 M_FL.P28 M_FR.P18 M_FR.P19 M_FR.P20 M_FR.P26 M_FR.P27 M_FR.P28
LG_SIG: LDR.2 LG_R2.2 U$2.13
LIGHT_INT: U$2.29 U$15.10
LS0: MUX_L1.10 MUX_L2.10 MUX_L3.10 U$2.25
LS1: MUX_L1.11 MUX_L2.11 MUX_L3.11 U$2.26
LS2: MUX_L1.14 MUX_L2.14 MUX_L3.14 U$2.27
LS3: MUX_L1.13 MUX_L2.13 MUX_L3.13 U$2.28
LSIG1: 2C4.1 2R4.2 MUX_L1.1 U$2.10
LSIG2: 2C5.1 2R5.2 MUX_L2.1 U$2.11
LSIG3: 2C6.1 2R6.2 MUX_L3.1 U$2.12
LSWITCH: LC1.1 LC2.1 LC3.1 LC4.1 LC5.1 LC6.1 LD1.A LD2.A LD3.A LD4.A LD5.A LD6.A LD7.A LD8.A LD9.A LD10.A LD11.A LD12.A LD13.A LD14.A LD15.A LD16.A LD17.A LD18.A LD19.A LD20.A LD21.A LD22.A LD23.A LD24.A LD25.A LD26.A LD27.A LD28.A LD29.A LD30.A LD31.A LD32.A LD33.A LD34.A LD35.A LD36.A LED.2 LS1.1
M_SWITCH: M1R1.1 M1R2.1 M2R1.1 M2R2.1 M3R1.1 M3R2.1 M4R1.1 M4R2.1 S3.2
MISO: MOUSE.7 U$2.40
MOSI: MOUSE.8 U$2.41
MOT: MOUSE.4 U$2.43
N$1: 1C3.1 U1.1
N$2: 1C3.2 1D1.C 1L1.P1 U1.8
N$4: 1R1.1 1R2.2 U1.4
N$11: M1R1.2 M1R4.1 M_FL.P5
N$12: M1R2.2 M1R3.1 M_FL.P9
N$13: M1R5.2 M_FL.P4
N$14: M1R6.2 M_FL.P10
N$15: M1R7.2 M_FL.P7
N$16: M1R8.2 M1R10.2 M_FL.P8
N$17: M1R9.2 M_FL.P6
N$18: M1C2.1 M1C3.1 M1Q1.4 M_FL.P3 M_FL.P13 M_FL.P23 M_FL.P$19 M_FL.P$20 M_FL.P$21 M_FL.P$22 M_FL.P$23 M_FL.P$24 M_FL.P$25 M_FL.P$26 M_FL.P$27 M_FL.P$28 M_FL.SLUG1
N$19: M1Q1.1 M_FL.P11
N$20: M2R2.2 M2R3.1 M_FR.P9
N$21: M1D1.A M1D2.C M1R12.1
N$22: M2R1.2 M2R4.1 M_FR.P5
N$23: M2R6.2 M_FR.P10
N$24: M2R5.2 M_FR.P4
N$25: M2R7.2 M_FR.P7
N$26: M2R8.2 M2R10.2 M_FR.P8
N$27: M2R9.2 M_FR.P6
N$28: M2C2.1 M2C3.1 M2Q1.4 M_FR.P3 M_FR.P13 M_FR.P23 M_FR.P$19 M_FR.P$20 M_FR.P$21 M_FR.P$22 M_FR.P$23 M_FR.P$24 M_FR.P$25 M_FR.P$26 M_FR.P$27 M_FR.P$28 M_FR.SLUG1
N$29: M2Q1.1 M_FR.P11
N$30: M3R2.2 M3R3.1 M_BL.P9
N$31: M2D1.A M2D2.C M2R12.1
N$32: M3R1.2 M3R4.1 M_BL.P5
N$33: M3R6.2 M_BL.P10
N$34: M3R5.2 M_BL.P4
N$35: M3R7.2 M_BL.P7
N$36: M3R8.2 M3R10.2 M_BL.P8
N$37: M3R9.2 M_BL.P6
N$38: M3C2.1 M3C3.1 M3Q1.4 M_BL.P3 M_BL.P13 M_BL.P23 M_BL.P$19 M_BL.P$20 M_BL.P$21 M_BL.P$22 M_BL.P$23 M_BL.P$24 M_BL.P$25 M_BL.P$26 M_BL.P$27 M_BL.P$28 M_BL.SLUG1
N$39: M3Q1.1 M_BL.P11
N$40: M4R2.2 M4R3.1 M_BR.P9
N$41: M4R1.2 M4R4.1 M_BR.P5
N$42: M4R6.2 M_BR.P10
N$43: M4R5.2 M_BR.P4
N$44: M4R7.2 M_BR.P7
N$45: M3D1.A M3D2.C M3R12.1
N$46: M4R8.2 M4R10.2 M_BR.P8
N$47: M4R9.2 M_BR.P6
N$48: M4C2.1 M4C3.1 M4Q1.4 M_BR.P3 M_BR.P13 M_BR.P23 M_BR.P$19 M_BR.P$20 M_BR.P$21 M_BR.P$22 M_BR.P$23 M_BR.P$24 M_BR.P$25 M_BR.P$26 M_BR.P$27 M_BR.P$28 M_BR.SLUG1
N$49: M4Q1.1 M_BR.P11
N$50: M4D1.A M4D2.C M4R12.1
N$52: 2R1.2 MUX_L1.15
N$53: MUX_L1.16 Q1.E
N$54: MUX_L1.17 Q2.E
N$55: MUX_L1.18 Q3.E
N$56: MUX_L1.19 Q4.E
N$57: MUX_L1.20 Q5.E
N$58: MUX_L1.21 Q6.E
N$59: MUX_L1.22 Q7.E
N$60: MUX_L1.23 Q8.E
N$61: MUX_L1.2 Q9.E
N$62: MUX_L1.3 Q10.E
N$63: MUX_L1.4 Q11.E
N$64: MUX_L1.5 Q12.E
N$65: MUX_L1.6 Q13.E
N$66: MUX_L1.7 Q14.E
N$67: MUX_L1.8 Q15.E
N$68: MUX_L1.9 Q16.E
N$69: LD1.C LD2.C LD3.C LD4.C LD5.C LD6.C LD7.C LD8.C LD9.C LD10.C LD11.C LD12.C LD13.C LD14.C LD15.C LD16.C LD17.C LD18.C LD19.C LD20.C LD21.C LD22.C LD23.C LD24.C LD25.C LD26.C LD27.C LD28.C LD29.C LD30.C LD31.C LD32.C LD33.C LD34.C LD35.C LD36.C LR1.1
N$70: R2.2 RST.P$1
N$72: BOOT.P$1 R3.1
N$73: R5.2 U$2.19
N$74: D1.A R5.1
N$82: 2R2.2 MUX_L2.15
N$83: MUX_L2.16 Q17.E
N$84: MUX_L2.17 Q18.E
N$85: MUX_L2.18 Q19.E
N$86: MUX_L2.19 Q20.E
N$87: MUX_L2.20 Q21.E
N$88: MUX_L2.21 Q22.E
N$89: MUX_L2.22 Q23.E
N$90: MUX_L2.23 Q24.E
N$91: MUX_L2.2 Q25.E
N$92: MUX_L2.3 Q26.E
N$93: MUX_L2.4 Q27.E
N$94: MUX_L2.5 Q28.E
N$95: MUX_L2.6 Q29.E
N$96: MUX_L2.7 Q30.E
N$97: MUX_L2.8 Q31.E
N$98: MUX_L2.9 Q32.E
N$99: 2R3.2 MUX_L3.15
N$100: MUX_L3.16 Q33.E
N$101: MUX_L3.17 Q34.E
N$102: MUX_L3.18 Q35.E
N$103: MUX_L3.19 Q36.E
NOT_BL_DIR: M3R6.1 MU2.6
NOT_BR_DIR: M4R6.1 MU2.4
NOT_FL_DIR: M1R6.1 MU1.6
NOT_FR_DIR: M2R6.1 MU1.4
NRESET: MOUSE.3 U$2.42
OSC_IN: C6.2 U$2.5 Y1.P$2
OSC_OUT: C7.2 U$2.6 Y1.P$1
RESET: R1.1 RST.P$2 U$2.7
RX1: U$2.31 X2.6
RX3: U$2.22 U$15.11
SCK: MOUSE.6 U$2.39
SS: MOUSE.5 U$2.38
SWCLK: U$2.37 X2.2
SWDIO: U$2.34 X2.3
TX1: U$2.30 X2.5
TX3: U$2.21 U$15.9
V_BATT: 1C1.1 1C2.1 M1Q1.3 M2Q1.3 M3Q1.3 M4Q1.3 M_BL.P12 M_BR.P12 M_FL.P12 M_FR.P12 R6.2 U1.7 U$1.+ V_BATT_M1.P$1 V_BATT_M2.P$1 V_BATT_M3.P$1 V_BATT_M4.P$1
VCCA: C4.2 C5.2 FB1.2 LDR.1 Q1.C Q2.C Q3.C Q4.C Q5.C Q6.C Q7.C Q8.C Q9.C Q10.C Q11.C Q12.C Q13.C Q14.C Q15.C Q16.C Q17.C Q18.C Q19.C Q20.C Q21.C Q22.C Q23.C Q24.C Q25.C Q26.C Q27.C Q28.C Q29.C Q30.C Q31.C Q32.C Q33.C Q34.C Q35.C Q36.C U$2.9

## Tracks (layer width: path | path; a pad name or v marks a point on that pad's centre or on a via)
3.3V  (via drill 0.51)
  Top 0.254: 80.91,60.9 81.55,60.26 82.37,60.26 82.56,60.46 82.56,60.85 MU2.5 83.25,60.85 83.25,60.46 83.45,60.26 84.27,60.26 84.85,60.84 3C2.1 | 80.91,60.9 80.91,66.19 78.41,68.69 M3R3.2 | M1R3.2 69.81,134.59 v69.81,134.89 69.81,146.99 v68.84,147.96 | M1R4.2 78.61,125.79 v78.61,126.19 78.61,125.54 80.26,123.89 81.56,123.89 3C1.1 82.06,124.29 | 82.06,124.29 82.06,122.7 82.8,121.96 82.8,120.31 MU1.5 | v6.81,99.69 6.81,97.81 1C5.1 9.74,99.99 1C4.A 9.86,101.11 1R1.2 11.33,103.25 1L1.P2 14.61,111.52 14.61,112.59 19.79,117.77 37.65,117.77 41.98,122.1 49.82,122.1 v59.41,131.69 | 82.06,124.29 82.34,124.29 85.93,120.7 v86.07,120.83 | 113.08,120.78 115.93,123.64 115.93,123.97 116.86,124.9 M2R3.2 116.71,126.29 v116.71,129.39 116.04,129.39 v115.71,129.72 | LS1.2 12.51,89.19 v11.11,90.59 | v111.96,120.94 112.12,120.78 113.08,120.78 | 2C3.1 84.71,59.34 3C2.1 | 3C2.1 86.91,60.84 89.85,57.9 v93.31,57.9 | M4R4.2 116.81,67.99 v116.81,66.28 114.41,68.68 114.16,68.68 113.64,69.2 113.64,70.61 118.59,75.55 118.59,83.39 120.81,85.62 v120.81,102.19 | M4R3.2 126.1,59.68 v124.31,59.68 | X2.4 188.51,83.59 v188.81,83.29 189.3,83.79 190.95,83.79 193.81,86.65 193.81,104.24 R1.2 182.81,115.49 183.81,116.49 183.81,121.69 183.54,121.96 183.54,123.03 181.95,124.62 176.47,124.62 175.64,123.79 R3.2 175.46,122.1 172.11,118.75 169.07,118.75 156.57,131.25 v155.19,131.25 | M3R4.2 70.42,58.98 v70.42,58.48 70.75,58.81 76.88,58.81 78.97,60.9 80.91,60.9 | v61.31,134.32 63.31,134.32 64.64,132.99 v64.91,132.99 | v117.21,57.3 117.21,57.15 120.8,53.56 120.8,52.83 120.41,52.44 v120.41,46.59
  Top 0.254: v106.11,134.09 106.11,132.79 101.41,128.09 v99.72,128.09 | v116.71,132.18 117.58,132.18 121,135.6 122.57,135.6 124.47,133.7 M2R4.2 126.91,134.72 126.62,135.01 126.62,136.76 127.14,137.28 127.88,137.28 131.46,133.7 132.43,133.7 136.73,129.39 v148.31,129.39 | v156.31,128.64 155.16,127.49 v151.11,127.49 | v118.51,108.49 119.04,107.97 MOUSE.1 | v113.42,132.11 112.89,132.11 112.05,132.94 110.36,132.94 v108.71,134.59 | 113.08,120.78 | v106.41,143.47 105.24,142.3 99.43,142.3 v98.67,141.54 98.02,141.54 97.18,142.38 96.44,142.38 95.92,141.86 95.92,140.72 95.41,140.21 94.79,140.21 91.67,137.09 91.11,137.09 v91.01,136.99
  Bottom 0.254: v78.61,126.19 78.5,126.31 78.5,127.46 71.28,134.68 70.02,134.68 v69.81,134.89 67.91,132.99 v64.91,132.99 | v6.81,99.69 7.81,98.69 7.81,92.09 9.31,90.59 v11.11,90.59 | MUX_L1.24 70.31,147.49 70.31,148.29 70.71,148.69 2C1.1 69.68,147.96 v68.84,147.96 | v86.07,120.83 111.85,120.83 v111.96,120.94 113.57,120.94 114.83,119.69 114.83,119.13 119.9,114.06 119.9,113.33 118.51,111.94 v118.51,108.49 120.81,106.19 v120.81,102.19 | 2C2.1 122.57,46.18 MUX_L2.24 121.91,46.59 v120.41,46.59 | v117.21,57.3 116.91,57.6 116.91,66.18 v116.81,66.28 | v124.31,59.68 121.43,56.8 117.71,56.8 v117.21,57.3 | v188.81,83.29 188.81,88.55 U$15.13 | v70.42,58.48 70.42,51.07 MUX_L3.24 | v59.41,131.69 61.31,133.59 v61.31,134.32 | C8.1 FB1.1 95.47,142.38 97.83,142.38 v98.67,141.54 | v106.11,134.09 106.11,134.19 U$2.36 108.16,135.14 v108.71,134.59 | v116.71,132.18 v116.71,129.39 | v155.19,131.25 155.19,129.77 v156.31,128.64 | v151.11,127.49 150.21,127.49 v148.31,129.39 | v99.72,128.09 98.56,129.26 C2.1 C3.1 99.56,132.89 U$2.48 99.2,133.49 C1.1 98.56,134.14 U$2.1 96.38,135.14 95.7,135.82 92.18,135.82 v91.01,136.99 | v106.41,143.47 105.88,143.47 U$2.24 | v115.71,129.72 115.71,132.23 115.31,132.63 113.94,132.63 v113.42,132.11 | v93.31,57.9 116.61,57.9 v117.21,57.3
  pour Bottom: 98.81,134.49 99.81,134.49 99.81,131.49 99.81,129.19 99.41,128.79 98.21,128.79 97.81,129.19 97.81,133.89 97.81,134.29 98.01,134.49
  pour Top: 9.71,98.09 11.51,98.09 12.11,98.69 12.51,99.09 12.51,103.29 12.51,103.69 12.61,103.79 13.41,104.59 13.41,106.19 13.41,112.29 12.51,113.19 9.91,113.19 9.51,112.79 8.71,111.99 8.71,103.79 7.91,102.99 7.91,101.99 7.91,98.89 8.41,98.39 8.71,98.09
AGND  (via drill 0.51)
  Top 0.254: v80.01,55.59 80.01,54.59 84.66,49.95 84.66,47.5 88.99,43.17 | v112.01,42.89 111.81,43.09 89.06,43.09 88.99,43.17 | 88.99,43.17 98.86,53.05 101.64,53.05 103.28,54.69 v103.91,54.69 | v100.41,55.49 87.16,68.75 85.87,68.75 83.71,70.92 83.71,72.4 v81.01,75.09 | v88.51,116.99 88.51,117.62 93.73,122.84 93.73,129.18 v93.61,129.29 | v86.57,137.82 88.18,137.82 v90.01,135.99 | v82.32,110.89 80.17,108.74 v80.06,108.74
  Bottom 0.254: 2R4.1 2C4.2 85.5,136.74 v86.57,137.82 | 2C6.2 2R6.1 v80.01,55.59 | 2R5.1 2C5.2 112.66,42.89 v112.01,42.89 | U$2.8 96.22,138.64 95.88,138.31 95.14,138.31 95.02,138.42 C5.1 93.33,138.44 C4.1 FB2.2 90.01,138.24 v90.01,135.99 90.01,131.29 92.01,129.29 v93.61,129.29 | v103.91,54.69 101.21,54.69 v100.41,55.49 | v82.32,110.89 84.61,113.18 84.61,114.03 85.96,115.38 87.61,115.38 88.51,116.28 v88.51,116.99 | v80.06,108.74 80.44,108.36 80.44,108.27 81.01,107.7 v81.01,75.09
BATT_LVL  (via drill 0.51)
  Top 0.254: U$15.12 190.18,92.46 190.18,94.26 189.43,95 188.38,95 186.01,97.38 186.01,101.09 156.9,130.21 151.34,130.21 135.45,146.09 115.21,146.09 114.01,144.9 114.01,144.76 111.84,142.59 108.72,142.59 106.93,144.38 100.42,144.38 v99.91,144.89
  Bottom 0.254: v99.91,144.89 99.86,144.94 R7.2 R6.1
BL_CS  (via drill 0.51)
  Top 0.254: M3C1.1 75.01,67.59 M3R8.1 v76.31,64.09 | v76.31,64.09 | v76.71,72.39 76.71,82.6 77.23,83.12 77.23,83.39 74.82,85.81 74.82,105.15 83.31,113.64 83.31,114.91 83.48,114.91 84.57,116 86.17,116 92.72,122.55 92.72,132.71 93.06,133.05 93.06,135.61 95.63,138.18 97.01,138.18 98.46,139.64 99.46,139.64 99.72,139.89 100.41,139.89 100.51,139.99 101.21,139.99 v101.51,140.29
  Bottom 0.254: v76.31,64.09 76.31,71.99 v76.71,72.39 | v101.51,140.29 101.06,140.74 U$2.16
BL_DIR  (via drill 0.51)
  Top 0.254: M3R5.1 70.01,57.19 80.56,57.19 MU2.1 81.9,58.54 81.9,55.81 84.16,53.56 101.43,53.56 v110.44,62.57 | v145.01,97.99 146.41,99.4 162.75,99.4 166.57,103.22 170.04,103.22 172.3,100.96 172.3,97.99 v172.32,97.97
  Bottom 0.254: v110.44,62.57 111.74,62.57 112.81,63.64 112.81,65.88 141.74,94.81 144.32,94.81 145.01,95.49 v145.01,97.99 | v172.32,97.97 188.07,97.97 U$15.5
BL_OUTA  (8 unrouted)
  Top 0.254: M3D2.A M3D1.C 39.49,87.19 M3J1.+ 49.68,79.33 49.68,77.21 50.02,76.87 M_BL.P30 50.51,76.38 50.86,76.03 52.97,76.03 M_BL.P$7 | M_BL.P1 56.31,70.1 M_BL.P$4 | M_BL.SLUG2 56.31,77.17 M_BL.P25
BL_OUTB  (via drill 0.51)  (8 unrouted)
  Top 0.254: M3R12.2 36.23,91.07 36.23,91.81 37.08,92.66 37.08,93.32 37.36,93.6 40.4,93.6 M3J1.- 50.91,83.09 55.55,83.09 55.9,82.74 M_BL.P21 | M_BL.P$10 59.14,80 M_BL.P21 | M_BL.P15 72.31,73.41 71.96,73.76 71.65,73.76 v68.71,76.69 | M_BL.P21 56.39,83.23 56.04,83.58 56.04,85.72 57.62,87.3 58.41,87.3 59.44,86.28 M_BL.P16
  Bottom 0.254: v68.71,76.69 65.41,80 M_BL.P$15
BL_PWM  (via drill 0.51)
  Top 0.254: M3R7.1 M3R11.2 76.41,62 v80.01,65.59 | v142.61,95.79 143.77,94.63 150.41,94.63 151.97,96.19 164.37,96.19 165.21,97.04 v165.21,97.59
  Bottom 0.254: v80.01,65.59 111.81,65.59 142.02,95.8 v142.6,95.8 v142.61,95.79 | U$15.6 190.7,98.81 189.43,100.08 188.38,100.08 186.79,98.49 177.31,98.49 175.22,100.58 168.3,100.58 167.51,99.79 167.51,96.09 166.71,96.09 v165.21,97.59
BOOT0  (via drill 0.51)
  Top 0.254: BOOT.P$2 176.36,116.59 R4.2 176.41,115.64 v176.41,113.99 | v100.63,131.26 101.5,130.39 v101.5,129.44 | v100.11,123.89 101.61,122.39 102.23,122.39 114.42,110.21 v114.42,109.67 | v129.41,97.69 130.04,98.32 v138.91,98.32 | v139.51,101.99 139.51,106.39 141.11,107.99 141.11,109.24 141.1,109.25 141.1,109.98 141.71,110.59 v142.81,110.59 | v145.81,113.89 148.41,113.89 v148.61,114.09 | v153.21,114.29 153.61,114.7 153.85,114.7 157.14,117.98 157.88,117.98 159.04,116.82 165.88,116.82 166.71,115.99 v167.41,115.99
  Bottom 0.254: U$2.44 U$2.45 101.06,131.68 v100.63,131.26 | v101.5,129.44 101.5,125.28 v100.11,123.89 | v114.42,109.67 116.09,108 116.09,99.17 118.26,97 119.62,97 120.41,97.79 129.31,97.79 v129.41,97.69 | v138.91,98.32 139.51,98.92 v139.51,101.99 | v145.81,113.89 145.81,113.59 v142.81,110.59 | v148.61,114.09 153.01,114.09 v153.21,114.29 | v167.41,115.99 169.41,113.99 v176.41,113.99
BR_CS  (via drill 0.51)
  Top 0.254: M4C1.1 123.11,63.3 M4R8.1 123.01,62.89 v121.91,61.79 | v119.11,57.79 117.98,57.79 117.58,58.19 116.84,58.19 116.32,57.67 116.32,55.44 117.4,54.36 117.4,53.63 116.88,53.11 115.67,53.11 113.78,55 113.04,55 112.41,54.37 112.41,47.9 109.31,44.8 103.12,44.8 98.79,49.13 v98.79,49.67 | v103.31,137.29 103.31,135.19 98.83,130.71 98.83,126.67 98.42,126.26 98.42,124.33 100.86,121.89 102.02,121.89 113.53,110.38 113.53,109.27 114.8,108 114.8,73.2 106.15,64.55 105.61,64.55 105.09,64.03 105.09,63.3 105.82,62.57 105.82,59.38 101.01,54.57 97.89,54.57 v97.51,54.95
  Bottom 0.254: v121.91,61.79 121.91,60.59 v119.11,57.79 | v98.79,49.67 97.01,51.45 97.01,54.45 v97.51,54.95 | U$2.17 101.56,141.44 101.81,141.19 102.21,141.19 103.31,140.09 v103.31,137.29
BR_DIR  (via drill 0.51)
  Top 0.254: MU2.3 83.88,58.57 83.88,54.56 84.37,54.06 101.22,54.06 109.41,62.26 109.41,63.24 111.4,65.23 111.4,66.44 v111.78,66.82 | v122.91,71.09 121.93,71.09 121.52,71.5 118.35,71.5 117.78,72.07 117.51,72.07 116.54,71.1 116.54,69.92 M4R5.1 116.19,69.57 v114.53,69.57 | v144.81,81.79 150.91,81.79 151.1,81.6 157.07,81.6 158.8,83.33 158.8,86.18 161.51,88.89 161.51,89.77 162.33,90.59 163.49,90.59 164.31,89.77 164.31,86.92 165.43,85.79 173.51,85.79 174.01,85.29 v174.01,82.39
  Bottom 0.254: v122.91,71.09 129.11,71.09 131.03,69.17 139.29,69.17 144.02,73.91 144.02,80.56 144.81,81.35 v144.81,81.79 | v174.01,82.39 174.01,82.1 177.65,78.46 188.95,78.46 193.23,82.74 193.23,96.29 191.97,97.54 190.92,97.54 189.65,96.27 U$15.7 | v114.53,69.57 v111.78,66.82
BR_OUTA  (via drill 0.51)  (8 unrouted)
  Top 0.254: M4D2.A M4D1.C 153.29,88.02 M4J1.+ 145.98,89.29 M_BR.P25 | M_BR.SLUG2 136.68,80 M_BR.P25 | M_BR.P1 122.11,72.49 v121.71,72.49 | M_BR.P25 139.43,83.23 139.78,83.58 139.78,83.85 137,86.63 136.73,86.63 136.38,86.28 M_BR.P30
  Bottom 0.254: v121.71,72.49 129.21,80 M_BR.P$4
BR_OUTB  (via drill 0.51)  (8 unrouted)
  Top 0.254: M4R12.2 157.59,85.72 157.59,84.32 156.46,83.19 155.36,83.19 154.25,84.29 M4J1.- | M_BR.P21 139.51,77.17 M_BR.P$10 143.52,74.11 M_BR.P16 147.01,77.59 v147.41,77.59 | M_BR.P15 134.07,64.66 v134.07,64.78 | v137.34,68.02 139.51,70.2 M_BR.P$15
  Bottom 0.254: v147.41,77.59 152.01,82.19 M4J1.- | v134.07,64.78 137.31,68.02 v137.34,68.02
BR_PWM  (via drill 0.51)
  Top 0.254: M4R7.1 M4R11.2 119.61,63.68 v118.92,62.99 | v144.91,80.19 149.87,80.19 150.77,81.09 157.28,81.09 159.6,83.41 159.6,84.19 159.31,84.47 159.31,85.97 162.02,88.68 162.02,89.56 162.54,90.08 163.28,90.08 163.8,89.56 163.8,86.71 165.81,84.69 v172.31,84.69
  Bottom 0.254: v118.92,62.99 133.91,62.99 144.91,73.99 v144.91,80.19 | v172.31,84.69 186.15,84.69 188.44,82.41 189.18,82.41 190.18,83.41 190.18,89.18 190.92,89.92 191.97,89.92 192.72,90.67 192.72,94.26 191.45,95.53 U$15.8
FL_CS  (via drill 0.51)
  Top 0.254: M1C1.1 72.11,130.29 M1R8.1 74.71,132.89 v75.11,132.89 | v100.81,145.79 100.8,145.78 99.54,145.78 99.02,145.26 99.02,143.39 99,143.37 99,143.13 98.45,142.58 98.43,142.61 97.74,142.61 96.75,143.59 94,143.59 92.7,142.29 92.7,142.13 92.18,141.61 v88.4,141.61
  Bottom 0.254: v75.11,132.89 78.08,135.86 85.95,135.86 87.52,137.44 87.52,140.73 v88.4,141.61 | v100.81,145.79 100.81,144.51 100.06,143.76 U$2.14
FL_DIR  (via drill 0.51)
  Top 0.254: M1R5.1 78.81,120.74 MU1.1 81.96,117 v81.13,116.17 | v77.12,90.39 80.01,87.51 80.01,80.79 82.12,78.68 112.9,78.68 v113.01,78.79 | v129.11,95.39 138.91,95.39 140.2,96.68 143.18,96.68 144.31,95.55 v149.68,95.55 | v150.3,98.41 150.78,98.89 163.1,98.89 164.58,100.37 v165.58,100.37
  Bottom 0.254: v81.13,116.17 81.13,115.63 77.12,111.62 v77.12,90.39 | v113.01,78.79 127.02,92.81 127.02,94.86 127.54,95.38 129.1,95.38 v129.11,95.39 | v165.58,100.37 166.68,100.37 167.4,101.09 175.43,101.09 177.52,99 183.41,99 183.98,99.58 183.98,101.34 186.54,103.89 U$15.1 | v150.3,98.41 150.3,96.18 v149.68,95.55
FL_OUTA  (via drill 0.51)  (8 unrouted)
  Top 0.254: M1D2.A M1D1.C 40.29,106.89 M1J1.+ 57.31,106.89 M_FL.P30 62.2,111.78 M_FL.SLUG2 | M_FL.P1 73.61,121.56 v73.61,121.49 | M_FL.P25 59.14,115.79 M_FL.P$9
  Bottom 0.254: v73.61,121.49 69.31,121.49 M_FL.P$4
FL_OUTB  (8 unrouted)
  Top 0.254: M1R12.2 38.08,112.41 38.08,112.82 38.36,113.1 39.46,113.1 40.66,111.89 M1J1.- 49.58,111.89 M_FL.P21 | M_FL.P16 50.02,118.92 49.68,118.57 49.68,117.9 52.35,115.23 52.92,115.23 53.56,115.86 M_FL.P21 | M_FL.P21 56.31,118.62 M_FL.P$16 | M_FL.P$10 56.31,125.69 M_FL.P15
FL_PWM  (via drill 0.51)
  Top 0.254: M1R7.1 75.61,129.39 M1R11.2 77.11,131 82.53,131 83.97,132.44 87.04,132.44 89.21,130.27 89.21,124.25 v90.28,123.18 | v109.78,123.42 111.48,123.42 v111.89,123.02 | v129.11,99.09 129.99,99.97 v131.19,99.97 | v135.03,90.07 138.41,86.69 v139.51,86.69 | v142.27,84.33 143.92,82.68 143.92,79.93 144.54,79.31 146.95,79.31 148.41,77.85 148.41,76.05 150.77,73.69 153.84,73.69 156.01,75.86 156.01,77.05 161.85,82.89 v162.71,82.89
  Bottom 0.254: v90.28,123.18 97.22,123.18 97.7,122.7 109.06,122.7 v109.78,123.42 | v111.89,123.02 113.45,121.45 113.79,121.45 115.33,119.9 115.33,119.34 120.41,114.27 120.41,113.49 126.2,107.69 126.2,101.58 128.69,99.09 v129.11,99.09 | v135.03,90.07 135.03,90.17 131.19,94.02 v131.19,99.97 | v139.51,86.69 139.91,86.69 v142.27,84.33 | v162.71,82.89 165,85.18 171.04,85.18 171.42,84.8 171.42,75.24 176.72,69.94 180.3,69.94 183.71,73.35 183.71,76.95 184.71,77.95 189.16,77.95 193.73,82.53 193.73,101.61 U$15.2
FR_CS  (via drill 0.51)
  Top 0.254: M2C1.1 121.51,128.09 M2R8.1 121.31,128.2 v120.41,129.09 | v118.59,130.61 113.67,130.61 111.84,132.44 109.5,132.44 103.33,138.61 v102.33,138.61
  Bottom 0.254: v120.41,129.09 118.89,130.61 v118.59,130.61 | U$2.15 100.56,139.84 101.8,138.61 v102.33,138.61
FR_DIR  (via drill 0.51)
  Top 0.254: v85.61,117.59 MU1.3 | v127.51,136.39 127.51,135.29 M2R5.1 129.18,134.8 130.28,133.69 130.28,133.42 v131.11,132.59 | v142.81,127.49 147.3,127.49 v148.4,126.39 | v150.76,124.89 150.96,124.69 160.31,124.69 v179.01,105.99 | v117.03,120.92 115.53,120.92 v113.94,119.32 | v184.87,100.97 184.74,100.97 v180.92,104.8
  Bottom 0.254: v85.61,117.59 85.89,117.59 87.2,118.9 113.52,118.9 v113.94,119.32 | v127.51,136.39 130.21,133.69 130.21,125.49 126.61,121.89 124.97,121.89 124.78,122.08 124.04,122.08 122.87,120.92 v117.03,120.92 | v131.11,132.59 137.71,132.59 v142.81,127.49 | v148.4,126.39 149.26,126.39 v150.76,124.89 | U$15.3 188.53,100.97 v184.87,100.97 | v180.92,104.8 180.2,104.8 v179.01,105.99
FR_OUTA  (via drill 0.51)  (8 unrouted)
  Top 0.254: M2J1.+ 157.23,108.19 M2D1.C M2D2.A | M_FR.P1 139.51,125.69 M_FR.P$4 | M_FR.P25 141.43,116.71 141.14,116.71 139.51,118.34 M_FR.P$9 | M_FR.P30 145.79,118.92 146.14,118.57 146.14,118.3 143.37,115.53 143.09,115.53 142.75,115.87 M_FR.P25 | M_FR.P25 146.59,111.54 v146.59,110.72
  Bottom 0.254: v146.59,110.72 146.89,110.72 148.81,108.79 153.51,108.79 M2J1.+
FR_OUTB  (via drill 0.51)  (8 unrouted)
  Top 0.254: M2R12.2 159.89,104.72 159.89,103.62 158.96,102.69 157.86,102.69 157.35,103.19 M2J1.- | M_FR.P15 124.21,121.19 v124.41,121.19 | M_FR.P21 138.5,113.98 138.5,114.06 136.77,115.79 M_FR.P$16 | M_FR.P16 136.38,109.51 137.39,108.51 138.38,108.51 138.9,109.03 138.9,111.01 138.87,111.03 139.78,111.94 139.78,112.21 139.43,112.56 M_FR.P21 | M_FR.P21 139.92,113.05 140.26,112.7 142.11,112.7 v145.41,109.39
  Bottom 0.254: v124.41,121.19 129.81,115.79 M_FR.P$15 | v145.41,109.39 147.49,109.39 148.6,108.29 149.02,108.29 M2J1.-
FR_PWM  (via drill 0.51)
  Top 0.254: M2R7.1 122.31,131.69 M2R11.2 121.71,131.29 v120.51,131.29 | v128.08,124.62 129.03,124.62 v131.41,127 | v141.99,109.62 142.52,109.08 142.52,102.78 v141.31,101.56 | U$15.4 190.18,102.62 188.38,102.62 187.21,103.79 v185.01,103.79 | v174.37,102.05 174.34,102.02 174.34,89.91 v173.27,88.84 | v135.91,91 146.95,91 147.14,91.18 163.73,91.18 v165.19,89.72
  Bottom 0.254: v120.51,131.29 127.18,124.62 v128.08,124.62 | v131.41,127 132.73,125.68 133.55,125.68 136.72,122.51 136.72,112.93 140.03,109.62 v141.99,109.62 | v174.37,102.05 174.73,101.69 175.51,101.69 175.6,101.6 175.64,101.6 177.73,99.51 183.09,99.51 183.48,99.89 183.48,101.55 185.01,103.09 v185.01,103.79 | v173.27,88.84 173.24,88.81 169.67,88.81 169.46,88.6 166.31,88.6 v165.19,89.72 | v135.91,91 141.31,96.4 v141.31,101.56
GND  (via drill 0.51)  (37 unrouted)
  Top 0.254: M1R9.1 75.61,127.1 M1R11.1 77.91,129.39 v77.91,130.08 78.08,129.91 80.1,129.91 81.31,128.7 81.31,126.84 3C1.2 | M2R9.1 M2R11.1 122.91,132.9 v121.61,134.21 | M3R9.1 71.71,61.89 M3R11.1 72.91,60.79 v74.01,59.69 | M4R10.1 121.91,64.09 M4R11.1 v119.9,62.09 121.11,60.88 121.11,60.34 121.28,60.17 122.08,60.17 v122.91,60.99 123.01,60.99 M4C1.2 | v44.71,68.59 46.01,69.89 v47.01,69.89 | v120.71,39.09 118.3,41.51 118.3,44.36 117.78,44.88 115.8,44.88 113.41,47.28 v113.41,54.11 | M4R9.1 118.92,65.71 v118.92,65.37 | v117.81,61.39 115.91,61.39 115.6,61.08 114.94,61.08 114.42,60.56 114.42,56.08 v116.51,53.99 | v78.51,44.49 81.21,47.19 v81.21,49.19 | 2C3.2 v86.6,55.24 | v86.6,55.24 v86.61,55.25 | 3C2.2 86.6,58.75 v86.6,55.24 | MU2.2 v82.91,57.19 | v73.28,151.02 75.81,148.49 v75.81,140.49 | M3R10.1 75.01,63.19 v75.41,63.19 | v82.11,51.09 79.12,54.08 79.12,55.96 79.64,56.48 80.38,56.48 80.48,56.38 v81.01,56.38 | v82.79,53.67 82.79,53.07 v84.39,51.47 | v93.31,145.69 v93.31,147.53 | M2C1.2 120.11,127.1 v119.21,127.99 119.52,128.31 119.52,129.46 120.04,129.98 120.78,129.98 121.46,129.3 M2R10.1 | v116.78,122.22 117.18,122.22 118.02,121.38 118.02,110.39 122.01,106.41 122.01,104.79 120.57,103.35 MOUSE.2 | M1C1.2 71.11,132.74 71.8,133.43 71.8,136.31 v70.71,137.39 | X2.1 185.88,84.52 185.88,83.98 187.46,82.41 190.28,82.41 191.77,83.89 v192.34,83.89 | v88.91,139.29 87.82,139.29 v86.63,140.49 | v137.08,58.6 136.21,57.72 136.21,56.06 134.04,53.89 130.97,53.89 128.46,56.39 v126.61,56.39 | v142.54,63.77 142.58,63.77 144.94,61.4 147.52,61.4 v150.81,64.69 | v95.61,134.66 96.71,134.66 97.3,135.24 v99.56,135.24
  Top 0.254: v76.01,131.98 v76,131.98 M1R10.1 | v118.59,131.88 117.99,131.88 117.41,131.29 116.34,131.29 115.82,131.81 115.82,132.55 116.34,133.07 116.38,133.07 v117.91,134.59 | C7.1 C6.1 | GND_M4B.P$1 149.46,97.99 149.93,97.52 150.75,97.52 151.61,98.38 163.31,98.38 164.26,99.34 166.51,99.34 C7.1 | C7.1 167.86,97.99 v168.41,97.99 | v173.36,99.12 v173.37,99.13 173.37,107.08 166.25,114.19 GND_M2B.P$1 | v106.6,149.27 104.13,149.27 v103.41,149.99
  Bottom 0.254: LC6.2 v44.71,68.59 | C2.2 C3.2 C1.2 95.7,134.66 v95.61,134.66 | LC4.2 121.66,39.09 v120.71,39.09 | v113.41,54.11 114.54,54.11 MUX_L2.12 114.91,53.99 v116.51,53.99 | v118.92,65.37 117.81,64.25 v117.81,61.39 119.21,61.39 v119.9,62.09 | LC5.2 74.48,38.49 73.65,37.66 71.74,37.66 v70.81,38.59 | 2R3.1 75.21,44.49 v78.51,44.49 | v81.21,49.19 81.21,50.12 MUX_L3.12 81.94,50.93 v82.11,51.09 84.01,51.09 v84.39,51.47 | 2C1.2 72.74,151.02 v73.28,151.02 | v75.81,140.49 75.98,140.32 MUX_L1.12 81.71,140.32 82.43,139.6 84.56,139.6 85.45,140.49 v86.63,140.49 | v75.41,63.19 75.41,61.09 v74.01,59.69 75.25,59.69 78.14,62.58 78.88,62.58 79.4,62.06 79.4,58.71 80.91,57.19 v82.91,57.19 82.1,56.38 v81.01,56.38 | v86.61,55.25 85.03,53.67 v82.79,53.67 | v93.31,145.69 93.26,145.64 C8.2 93.06,144.39 92.15,143.48 91.34,143.48 90.92,143.06 90.92,142.13 91.25,141.8 91.25,141.18 FB2.1 89.36,139.29 v88.91,139.29 | R7.1 97.62,147.53 v93.31,147.53 93.31,149.04 94.2,149.93 94.2,152.76 LR1.2 | v116.78,122.22 119.21,124.65 v119.21,127.99 117.7,129.5 117.7,130.99 v118.59,131.88 | 2R1.1 70.66,137.44 v70.71,137.39 | v192.34,83.89 191.45,84.78 U$15.14 | v121.61,134.21 120.17,135.64 119.21,135.64 | v126.61,56.39 125.2,57.81 125.2,60.05 124.68,60.57 123.33,60.57 v122.91,60.99 | v137.08,58.6 142.25,63.77 v142.54,63.77 | LC3.2 150.86,64.74 v150.81,64.69 | U$2.47 100.06,134.74 v99.56,135.24 105.56,135.24 105.91,135.6 | 119.21,135.64 U$2.35 | v77.91,130.08 v76.01,131.98 | 119.21,135.64 118.16,134.59 v117.91,134.59 | v168.41,97.99 170.85,97.99 171.98,99.12 v173.36,99.12 | 105.91,135.6 106.81,135.6 106.85,135.64 U$2.35
  Bottom 0.254: U$2.35 105.96,135.64 105.91,135.6 | U$2.23 104.56,143.77 106.6,145.81 v106.6,149.27 | v103.41,149.99 104.11,149.29 D1.C
  Bottom 1.016: GND_M1B.P$1 177.51,75.69 U$1.-
  pour Top (rank 2): -17.29,208.19 228.11,208.19 228.11,-12.31 -17.29,-12.31
  pour Bottom (rank 2): -17.29,208.19 228.11,208.19 228.11,-12.31 -17.29,-12.31
GND_M  (via drill 0.51)  (2 unrouted)
  Top 0.254: M_BL.P28 M_BL.P27 M_BL.P26 54.06,78 v54.22,78 | M_FR.P28 M_FR.P27 M_FR.P26 141.95,117.59 v141.51,117.59 | M_FL.P18 M_FL.P19 M_FL.P20 53.87,117.59 v54.01,117.59 | v58.11,113.49 58.11,113.35 M_FL.P26 M_FL.P27 M_FL.P28 57.71,110.12 v57.71,108.99 | v58.2,82.19 58.2,82.34 M_BL.P20 M_BL.P19 M_BL.P18 57.99,85.38 v57.99,86.41 | v137.61,113.69 137.61,113.45 M_FR.P20 M_FR.P19 M_FR.P18 138.01,110.22 v138.01,109.39 | M_BR.P18 M_BR.P19 M_BR.P20 141.75,77.99 v141.61,77.99 | M1C3.2 68.81,101.29 v67.71,101.29 68.11,100.89 v68.11,94.79 68.51,94.79 M3C3.2 70.11,93.19 v71.11,93.19 | M4C3.2 M2C3.2 128.31,101.99 v128.41,101.89 | v131.21,89.3 131.42,89.3 136.2,84.52 136.47,84.52 136.82,84.86 M_BR.P28 M_BR.P27 M_BR.P26 138.72,83.29 v137.57,82.14 | v127.91,94.49 127.21,93.8 M4C3.2 | v147.51,90.29 145.31,90.29 140.21,85.19 v140.21,85.09 | v163.51,108.79 163.51,102.75 162.23,101.47 156.68,101.47 v156.59,101.56 | M4C3.2 126.31,93.49 v124.81,91.99 | v102.11,77.79 100.51,76.19 v97.51,76.19 | v80.01,71.49 80.01,72.18 78.8,73.39 78.8,86.5 v75.91,89.39
  Top 1.016: M4C2.2 169.55,88.25 169.55,90.43 164.68,95.29 154.41,95.29 153.91,94.79 GND_M4A.P$1 | M2C2.2 166.48,111.79 GND_M2A.P$1
  Bottom 0.254: v54.01,117.59 v58.11,113.49 | v58.2,82.19 58.2,81.99 v54.22,78 | v137.61,113.69 v141.51,117.59 | v141.61,77.99 137.57,82.04 v137.57,82.14 137.57,82.45 v140.21,85.09 | v68.11,94.79 66.37,94.79 v57.99,86.41 | v67.71,101.29 65.41,101.29 v57.71,108.99 | v131.21,89.3 131.21,91.2 v127.91,94.49 | v128.41,101.89 130.61,101.89 138.01,109.29 v138.01,109.39 | v147.51,90.29 148.61,90.29 GND_M4A.P$1 | GND_M2A.P$1 164.01,109.29 v163.51,108.79 | v156.59,101.56 156.59,98.66 153.11,95.18 GND_M4A.P$1 | v124.81,91.99 110.61,77.79 v102.11,77.79 | v80.01,71.49 80.64,72.13 80.8,72.13 84.87,76.19 v97.51,76.19 | v75.91,89.39 72.11,93.19 v71.11,93.19 | GND_M4A.P$1
  Bottom 1.016: GND_M3A.P$1 25.64,87.68 M3C2.2 | M1C2.2 25.67,103.76 GND_M1A.P$1
LG_SIG  (via drill 0.51)
  Top 0.254: LG_R2.2 140.4,171.74 LDR.2 142.61,169.53 142.61,168.49 129.4,155.28 127.34,155.28 126.55,154.49 v109.11,154.49 | v98.11,143.49 98.11,146.59 v101.51,149.99
  Bottom 0.254: U$2.13 98.72,143.49 v98.11,143.49 | v101.51,149.99 106.01,154.49 v109.11,154.49
LIGHT_INT  (via drill 0.51)
  Top 0.254: v135.11,91.99 161.65,91.99 162.54,92.88 163.29,92.88 169.67,86.5 170.62,86.5 171.32,87.19 v183.41,87.19
  Bottom 0.254: U$15.10 190.18,92.46 190.18,90.67 189.43,89.92 186.14,89.92 v183.41,87.19 | v135.11,91.99 135.11,101.29 147.31,113.49 147.31,128.18 145.76,129.73 145.76,132.59 144.71,133.64 140.46,133.64 136.41,137.69 136.41,139.69 134.11,141.99 125.45,141.99 122.1,138.64 U$2.29
LS0  (via drill 0.51)
  Top 0.254: v110.61,51.93 110.61,56.11 v110.11,56.61 110.11,59.79 v111.51,61.19 | v113.71,63.19 113.71,66.49 v111.95,68.25 | v115.91,125.79 114.44,127.26 v114.44,129.69 | v114.61,131.5 114.61,137.21 v110.37,141.45 | v83.01,140.99 84.51,142.5 v90.03,142.5 | v91.95,144.64 92.41,144.64 92.94,144.11 93.68,144.11 97.94,148.37 v98.63,148.37 | v108.58,149.99 105.7,147.12 v99.89,147.12
  Bottom 0.254: U$2.25 107.07,141.64 | 107.07,141.64 v107.01,141.69 107.01,142.82 107.3,143.1 107.3,148.71 v108.58,149.99 | MUX_L1.10 82.38,141.62 v83.01,140.99 | MUX_L3.10 84.64,57.01 109.71,57.01 v110.11,56.61 | v110.61,51.93 111.25,52.57 MUX_L2.10 | v111.51,61.19 113.51,63.19 v113.71,63.19 | v111.95,68.25 114.16,70.46 115.96,70.46 132.21,86.71 132.21,89.39 132.1,89.51 132.1,91.03 130.51,92.61 130.51,99.39 129.51,100.39 128.11,100.39 126.71,101.79 126.71,110.29 116.98,120.03 116.66,120.03 115.88,120.81 115.88,125.77 v115.91,125.79 | v114.44,129.69 114.44,131.33 v114.61,131.5 | v110.37,141.45 107.25,141.45 107.07,141.64 | v90.03,142.5 90.41,142.88 90.41,143.47 90.93,143.99 91.3,143.99 v91.95,144.64 | v99.89,147.12 v98.63,148.37
LS1  (via drill 0.51)
  Top 0.254: v89.68,56.12 89.68,56.82 v87.5,58.99 | v83.11,115.79 83.82,116.51 85.78,116.51 91.73,122.46 v91.73,131.97 91.56,132.15 91.56,132.39 90.7,132.39 88.99,134.09 84.71,134.09 84.22,134.59 v84.22,140.51 | v104.91,140.19 102.67,140.19 101.86,139.39 100.61,139.39 100.35,139.13 98.67,139.13 97.22,137.67 95.84,137.67 93.57,135.4 93.57,132.63 v93.74,132.47
  Bottom 0.254: MUX_L1.11 81.78,140.97 82.64,140.11 83.82,140.11 v84.22,140.51 | MUX_L2.11 108.41,53.22 105.21,56.42 89.98,56.42 v89.68,56.12 88.73,56.12 85.4,52.78 81.33,52.78 MUX_L3.11 | v87.5,58.99 83.2,58.99 78.01,64.19 78.01,111.79 82.01,115.79 v83.11,115.79 | v93.74,132.47 92.22,132.47 v91.73,131.97 | v104.91,140.19 104.97,140.14 U$2.26
LS2  (via drill 0.51)
  Top 0.254: v102.08,51.52 105.55,55 v108.7,55 108.7,59.57 v109.11,59.98 | v79.51,137.65 82.67,134.49 v82.71,134.49 | v108.91,140.29 106.07,140.29 105.08,141.28 100.39,141.28 99.25,140.14 98.25,140.14 96.8,138.69 95.42,138.69 92.55,135.82 92.55,134.29 91.55,133.29 v91.11,133.29 90.71,133.29 88.81,135.19 v87.31,135.19 | v105.98,63.67 115.31,72.99 115.31,110.04 99.45,125.89 v99.31,125.89 | v119.91,53.19 v117.22,55.89